# Altium PCB PCB V1.0.PcbDoc (part 1 of 3)
Units mil, origin at the board's own origin, x right, y up, seen from the top; angles counter-clockwise.
Board outline 1771.65 x 1771.65 mil, 6 copper layers (SIG/GND1, GND1, PWR, SIG/GND2, GND2, SIG/GND3), stack 60.866 mil thick; 266 components, 127 nets, 826 pads, 928 vias.
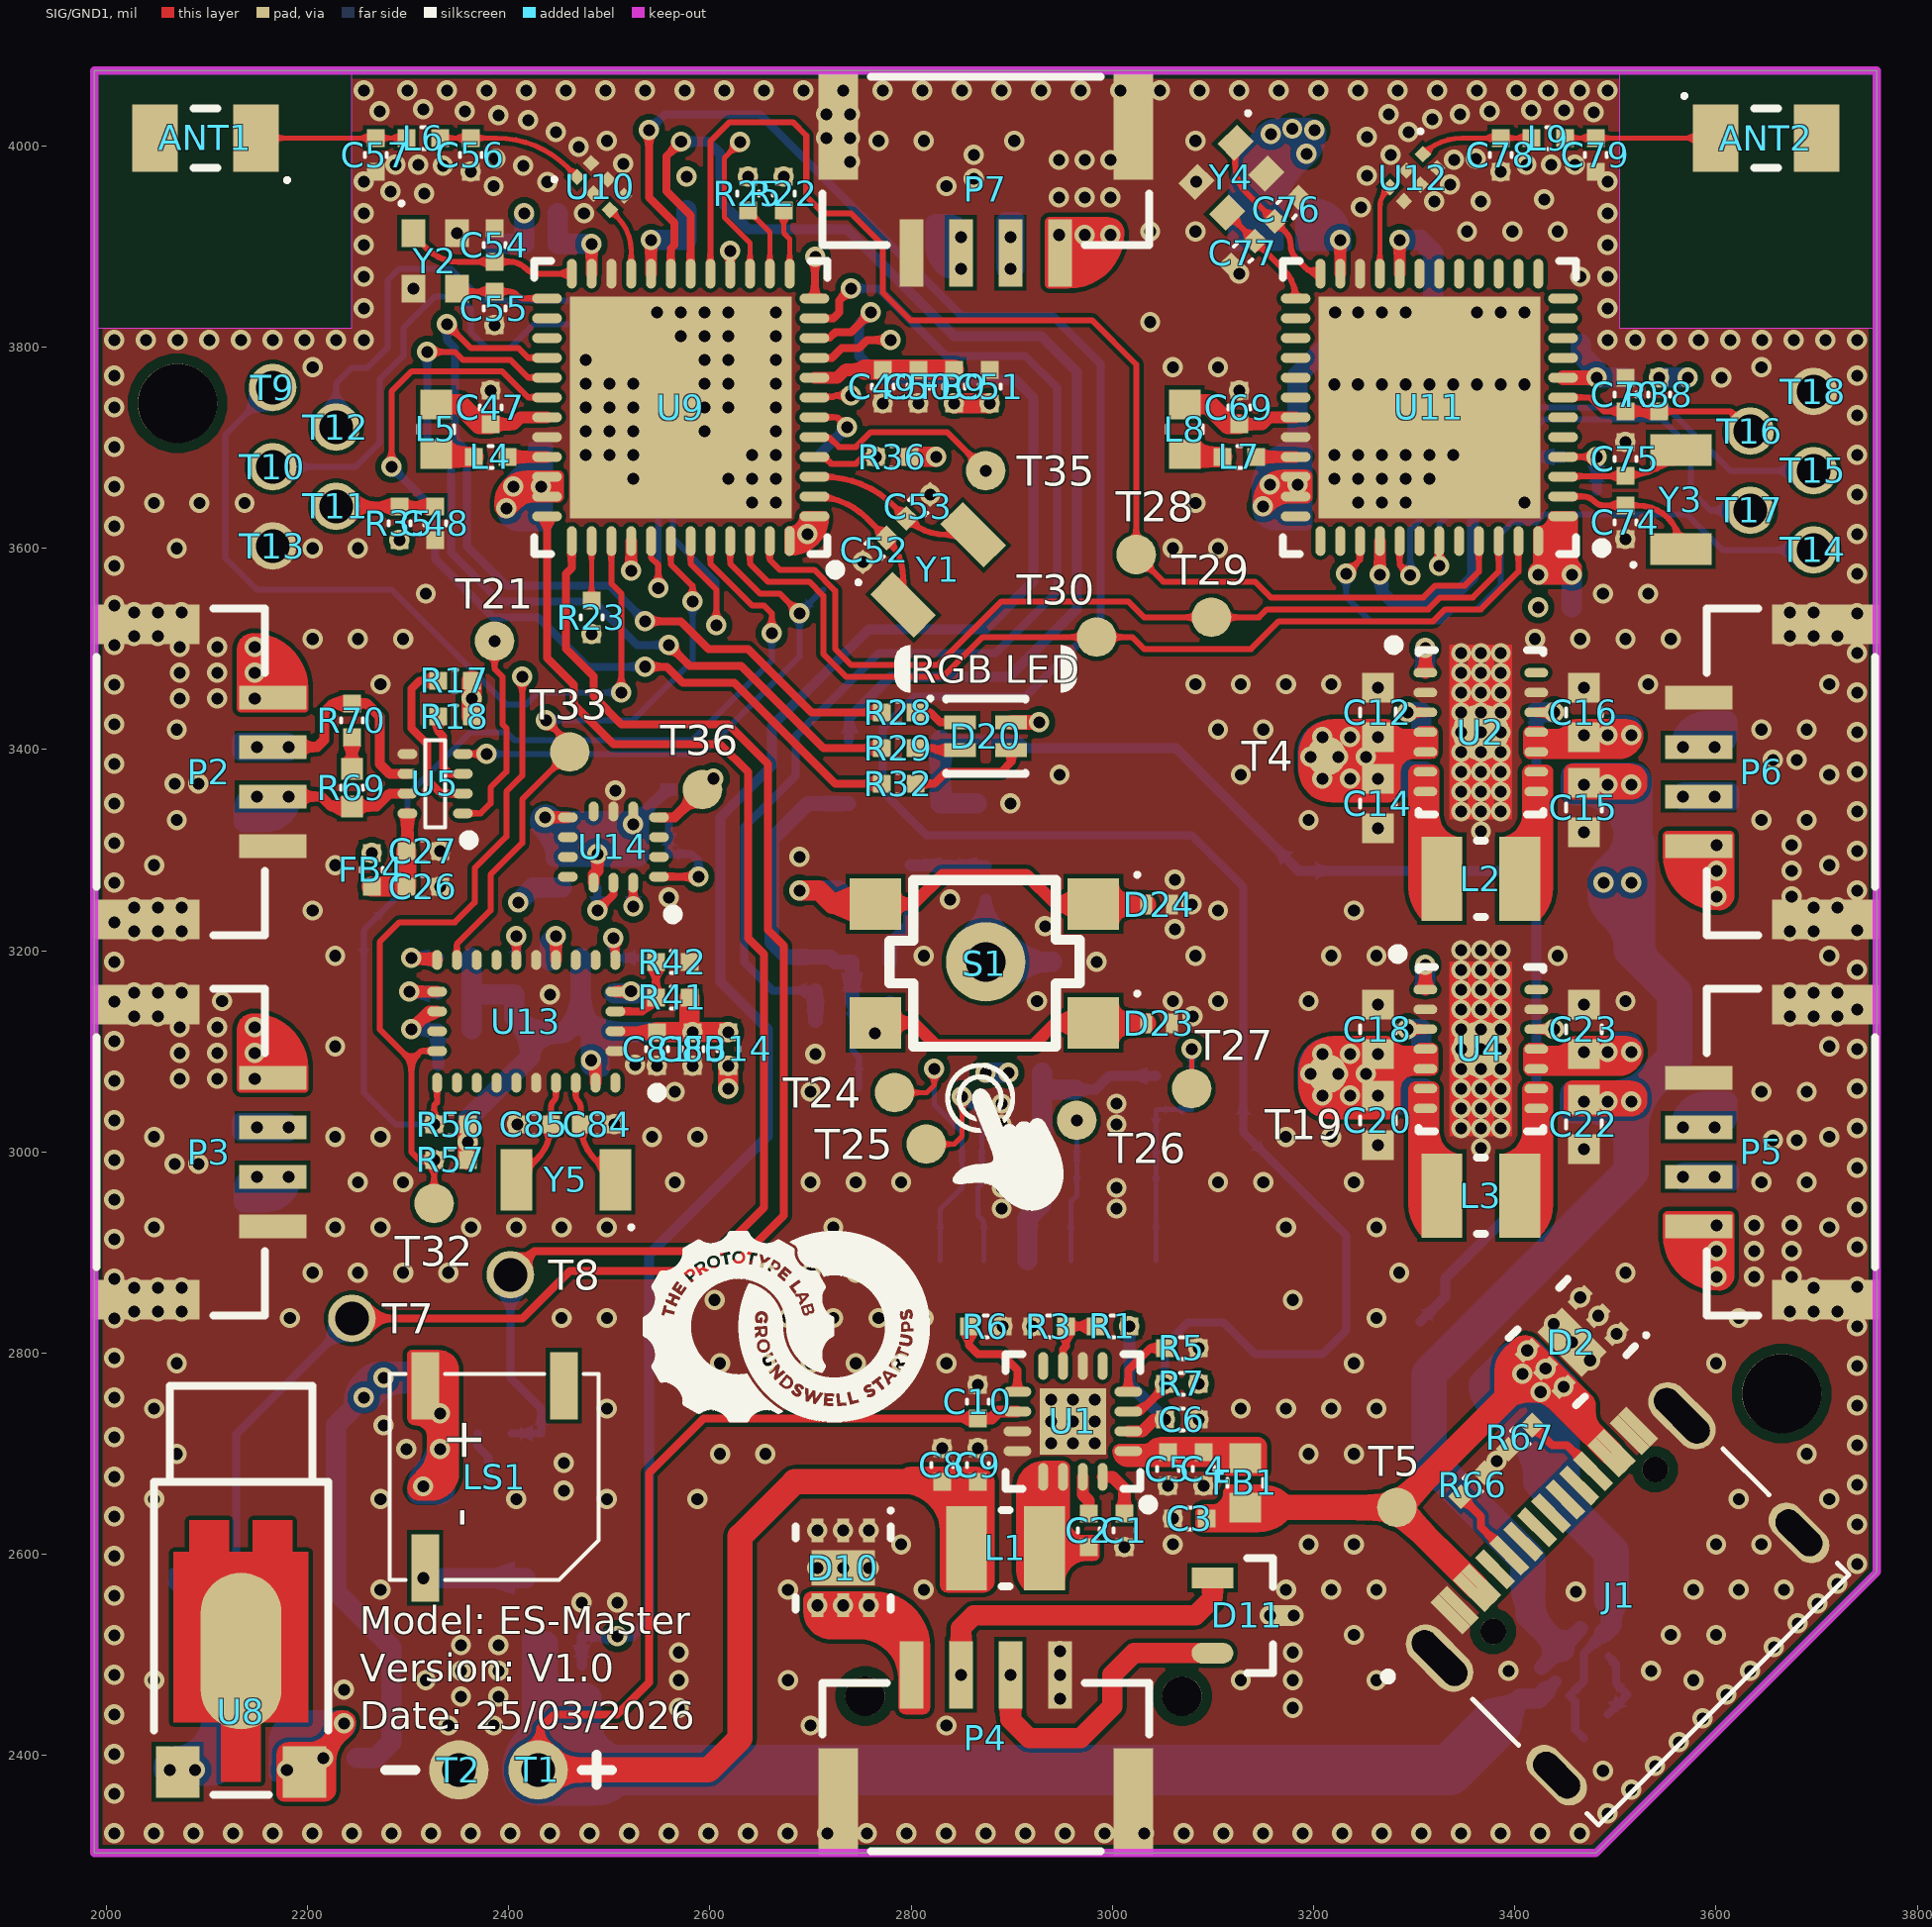
[diagram p0: SIG/GND1 view]
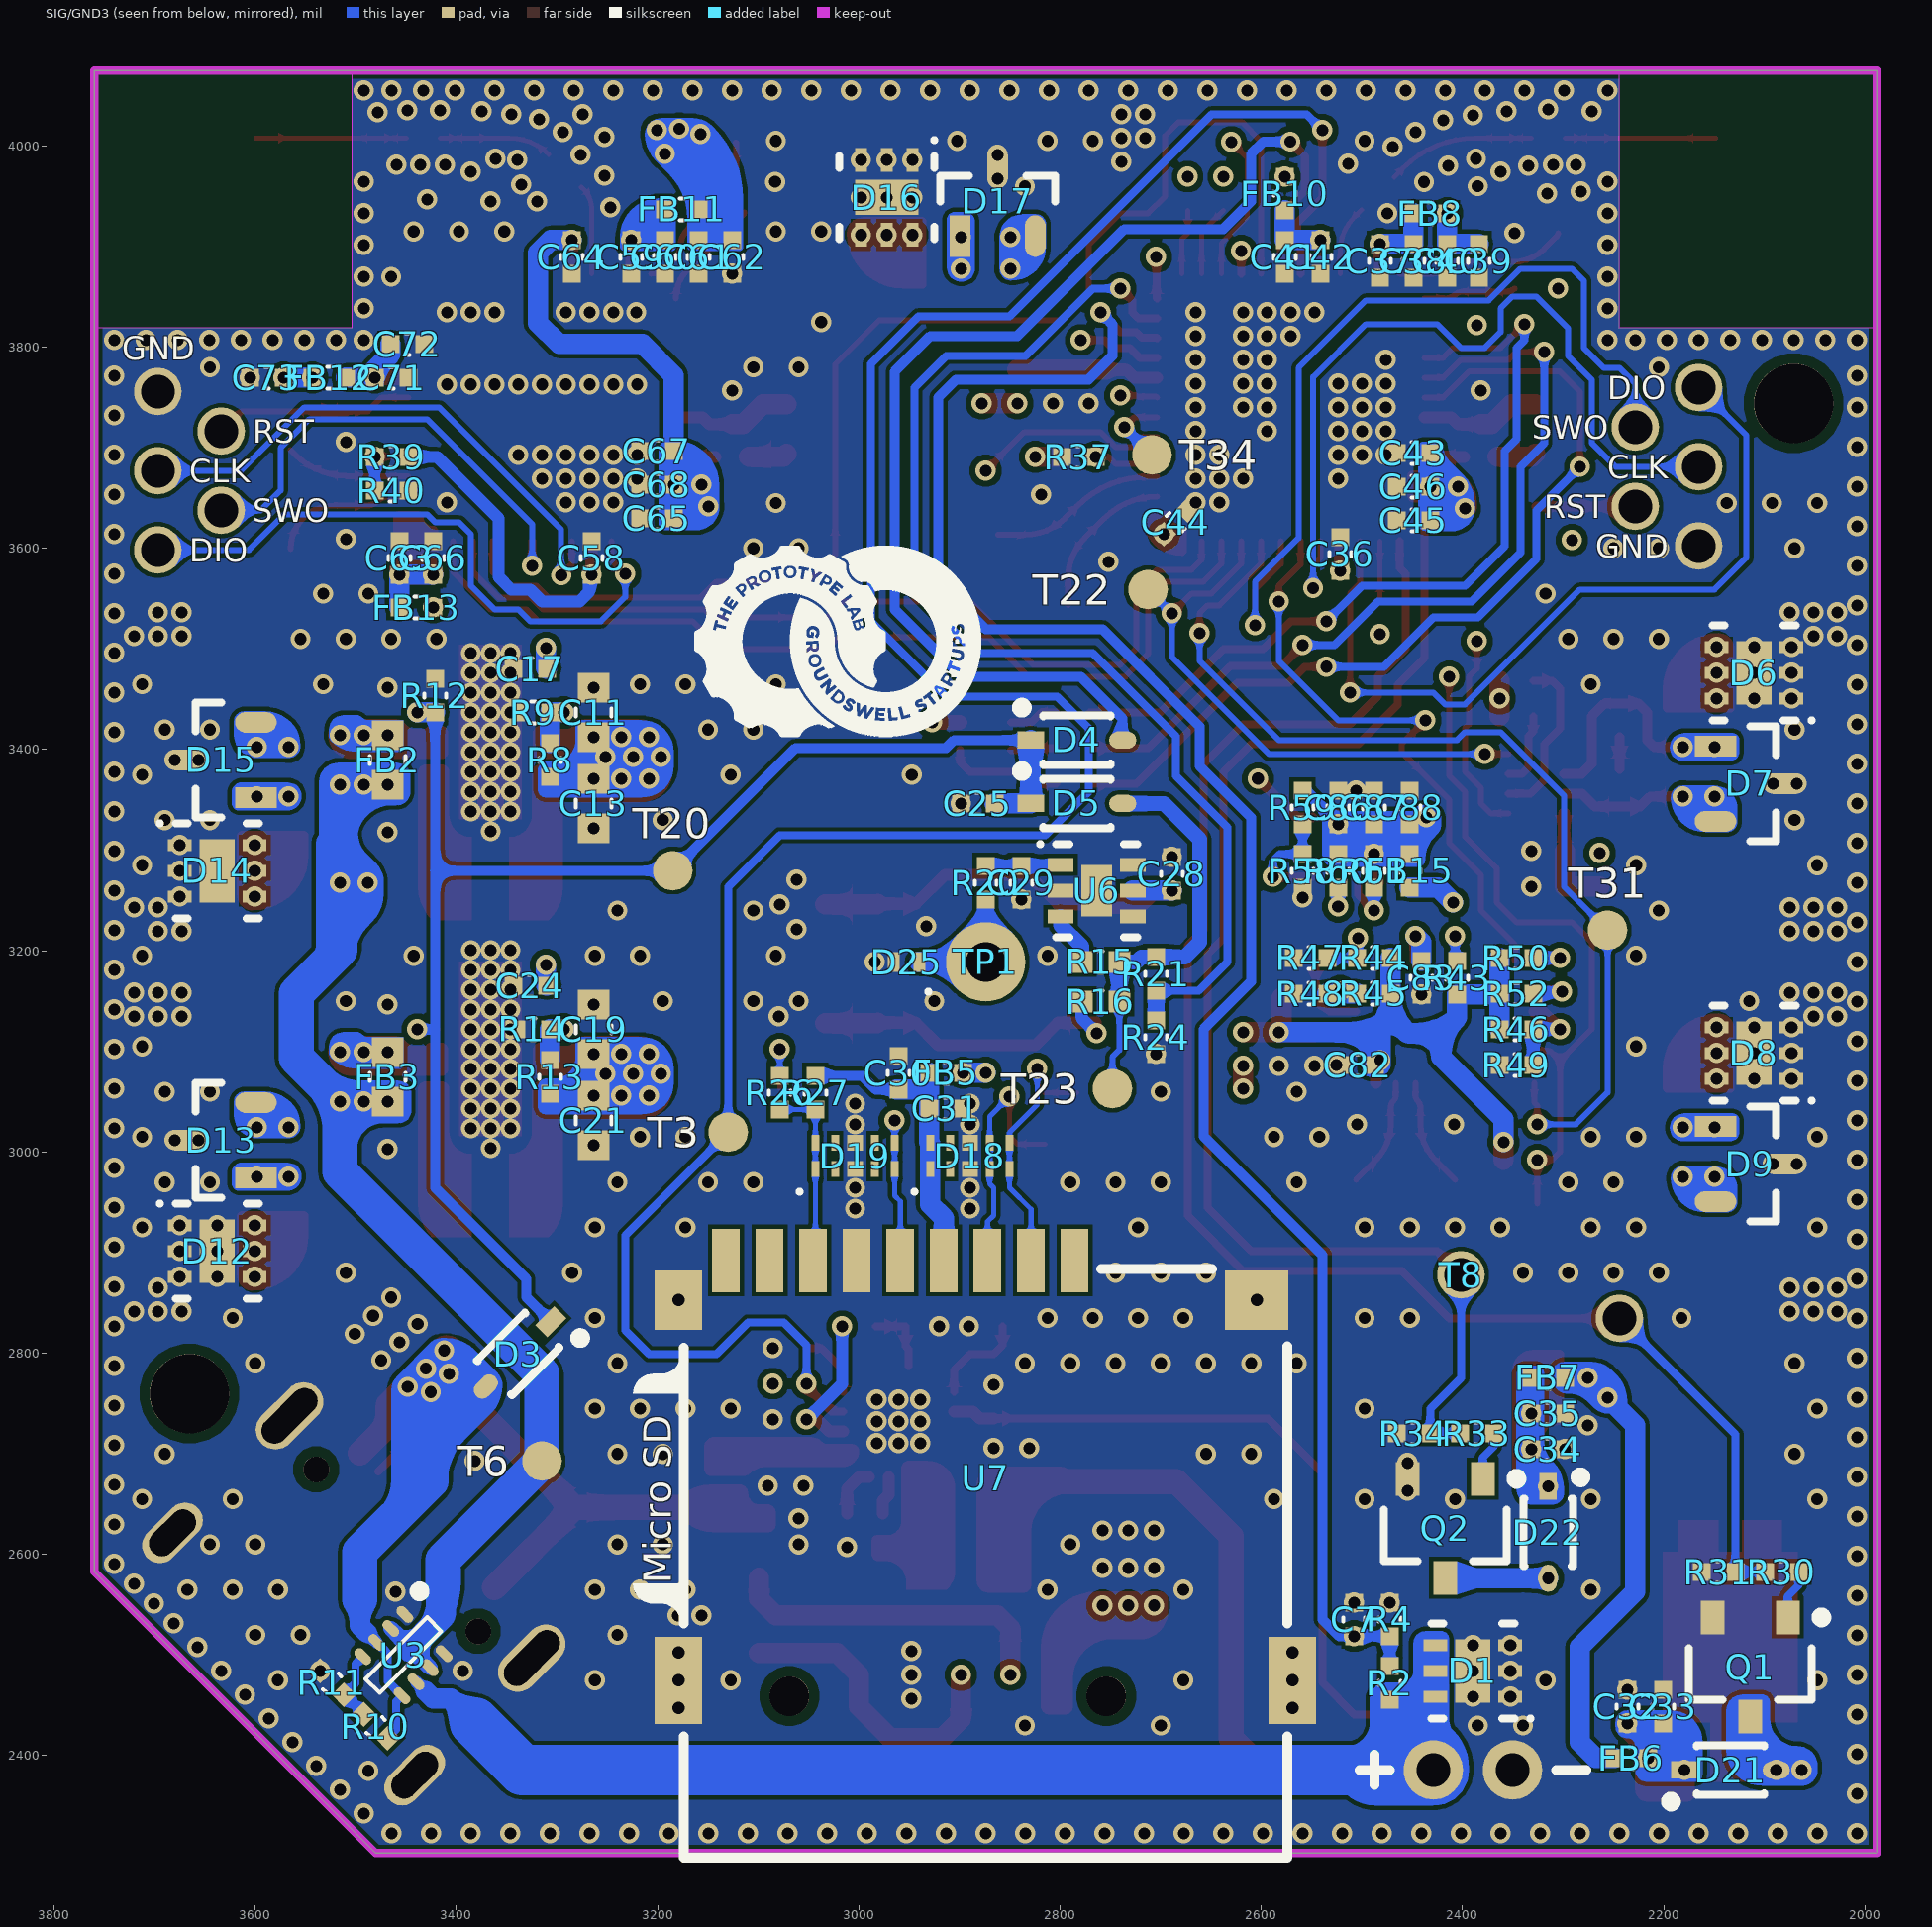
[diagram p1: SIG/GND3 view, seen from below]
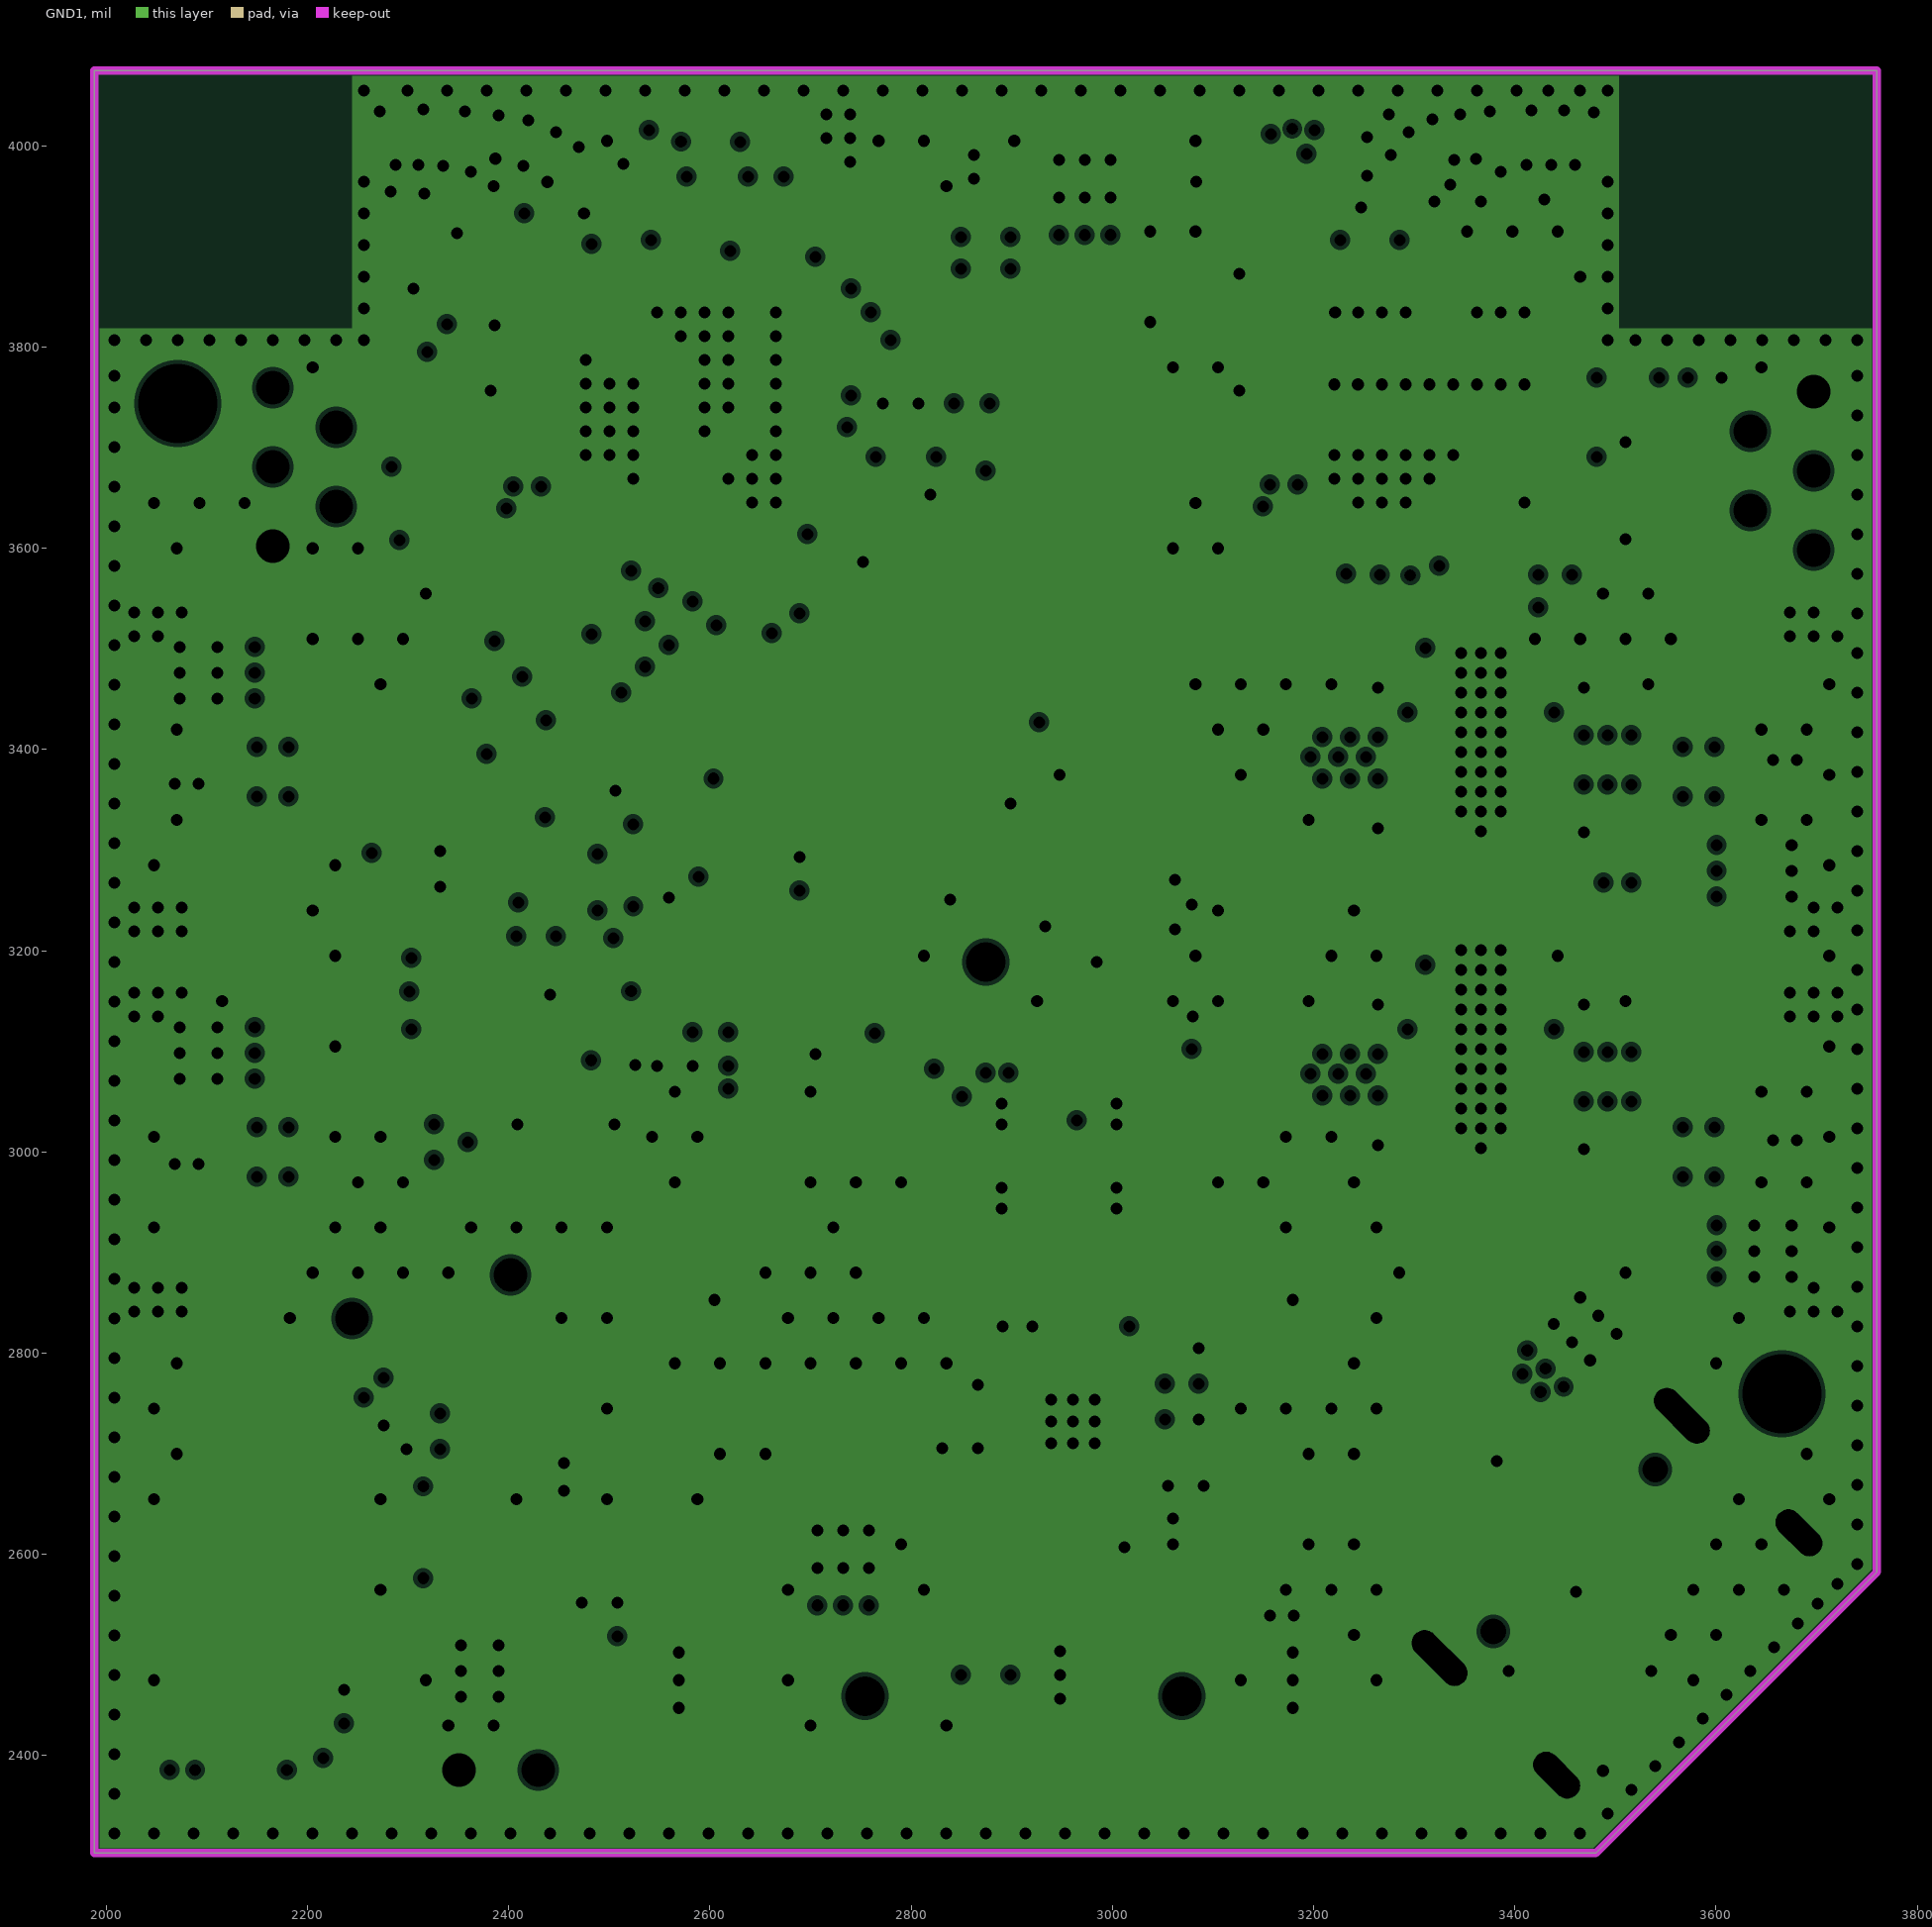
[diagram p2: GND1, clearances drawn from the general rule]
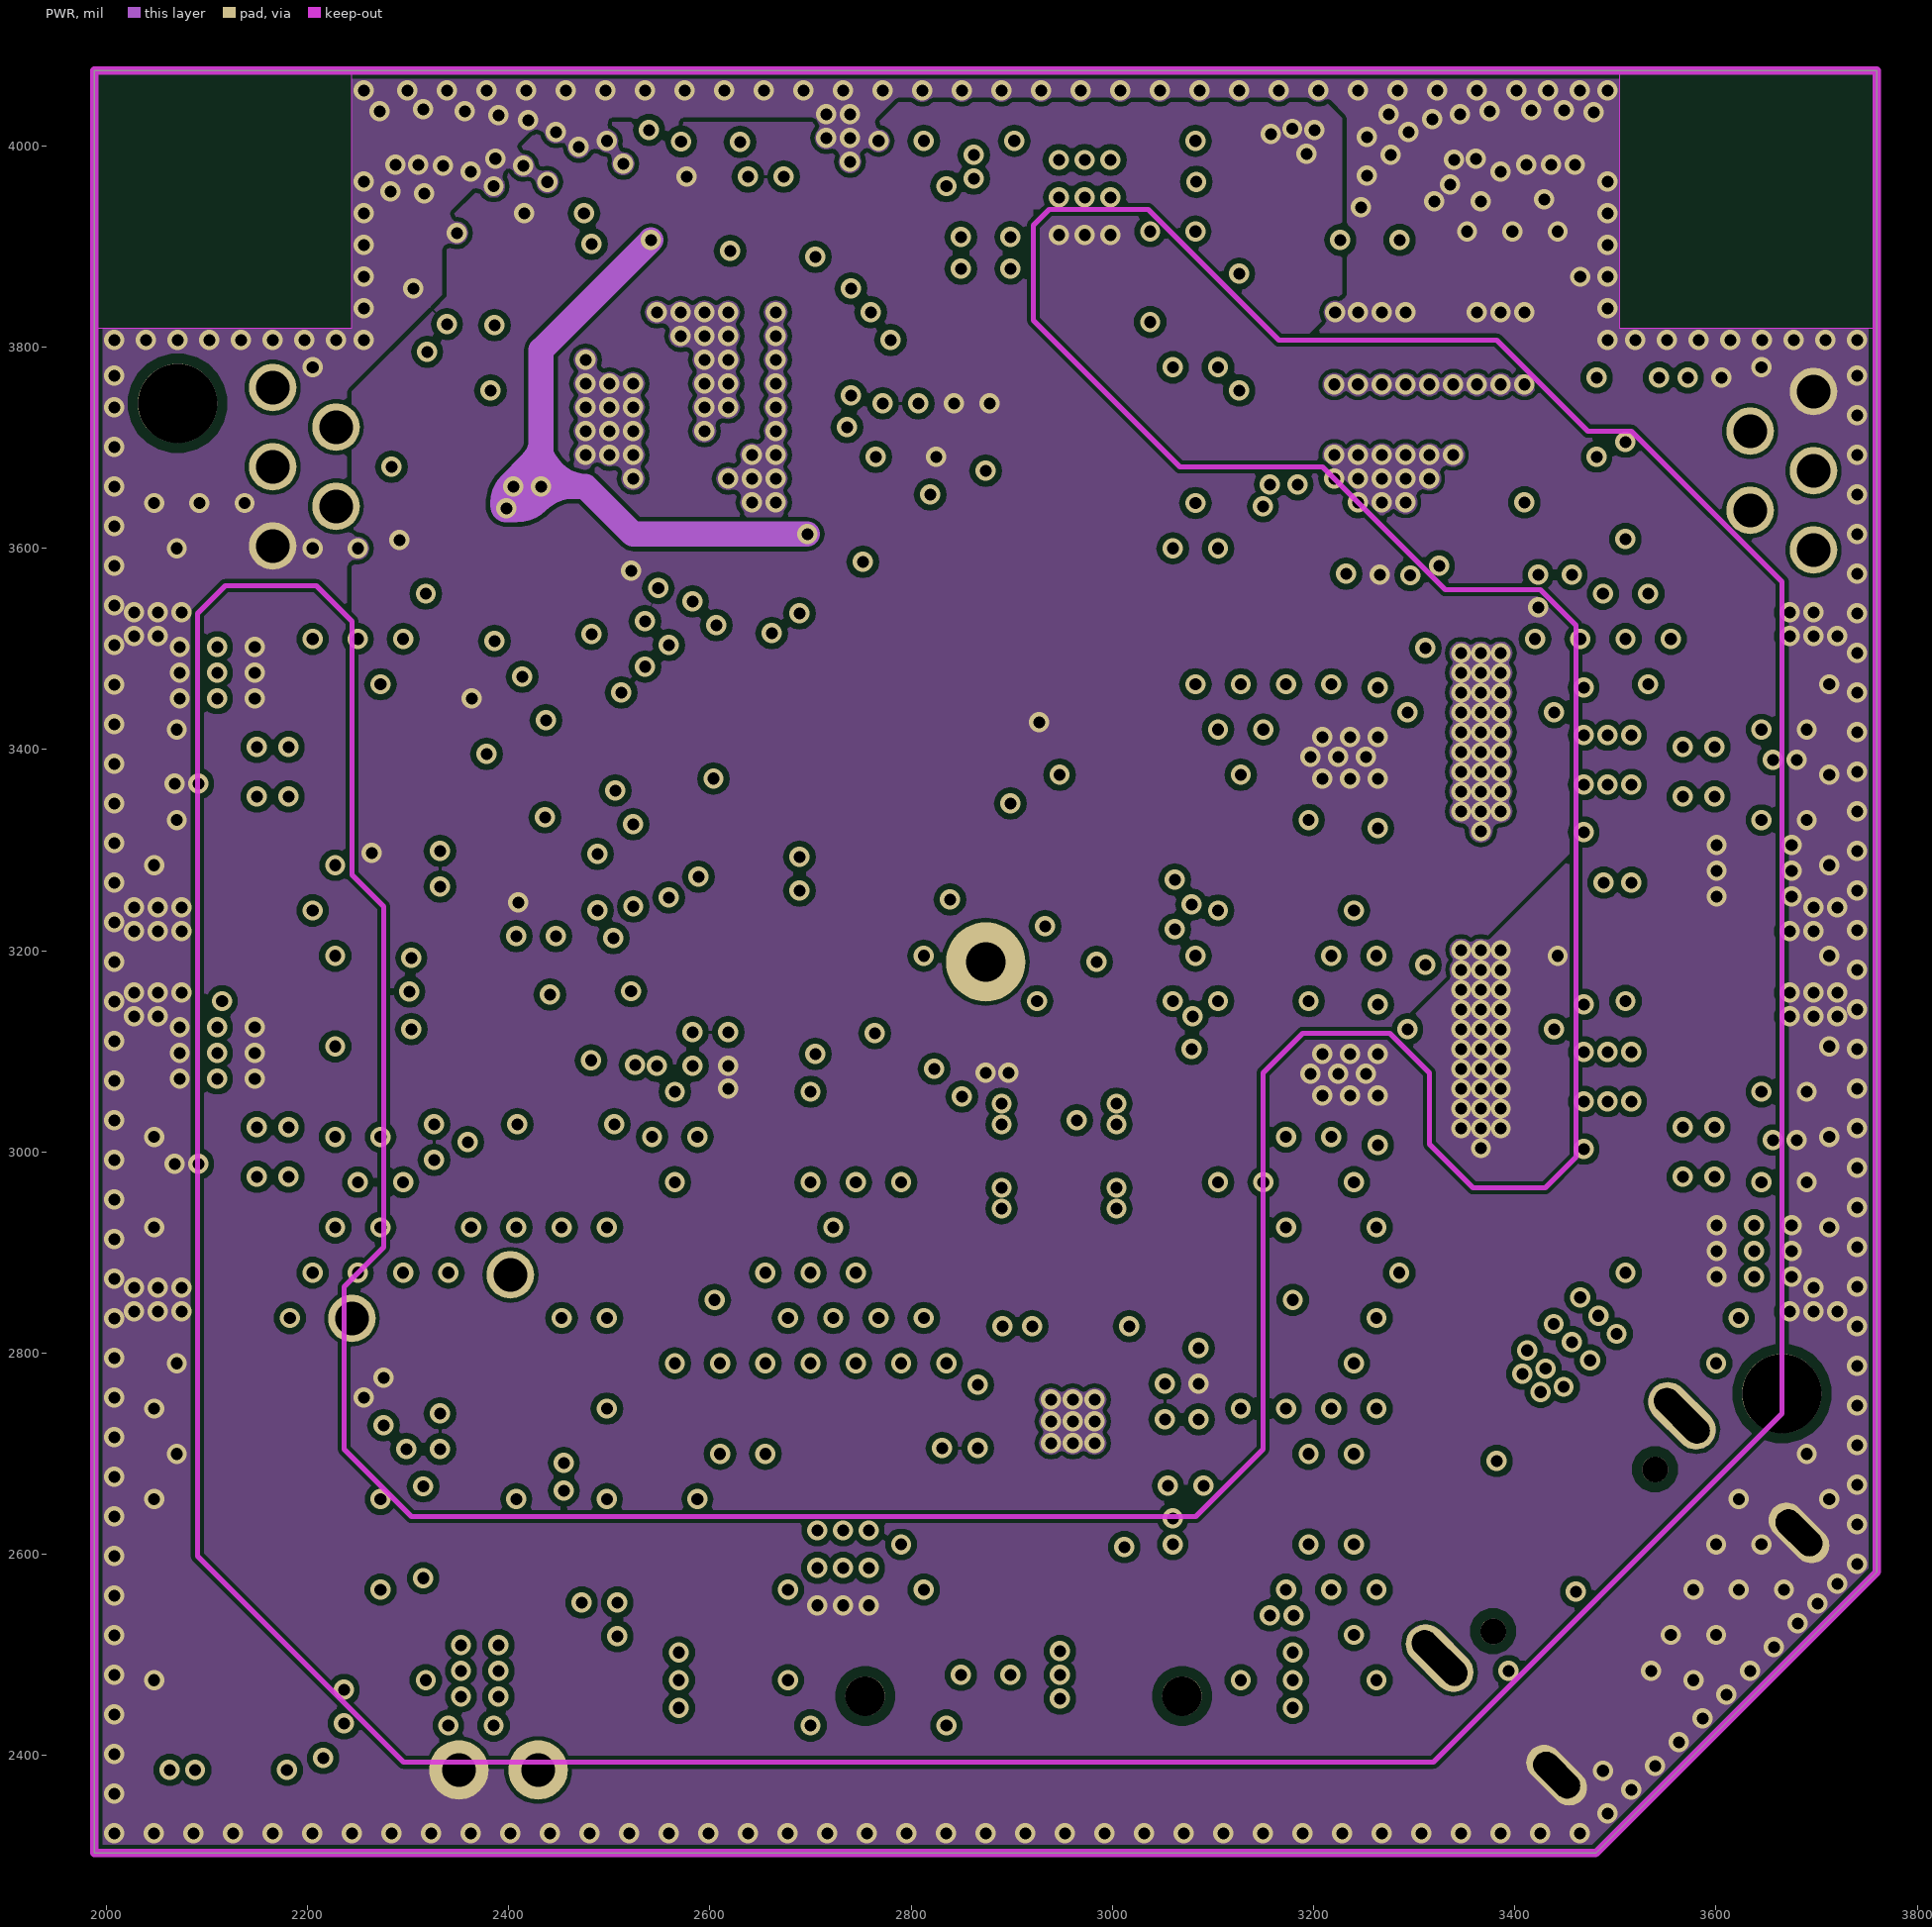
[diagram p3: PWR]
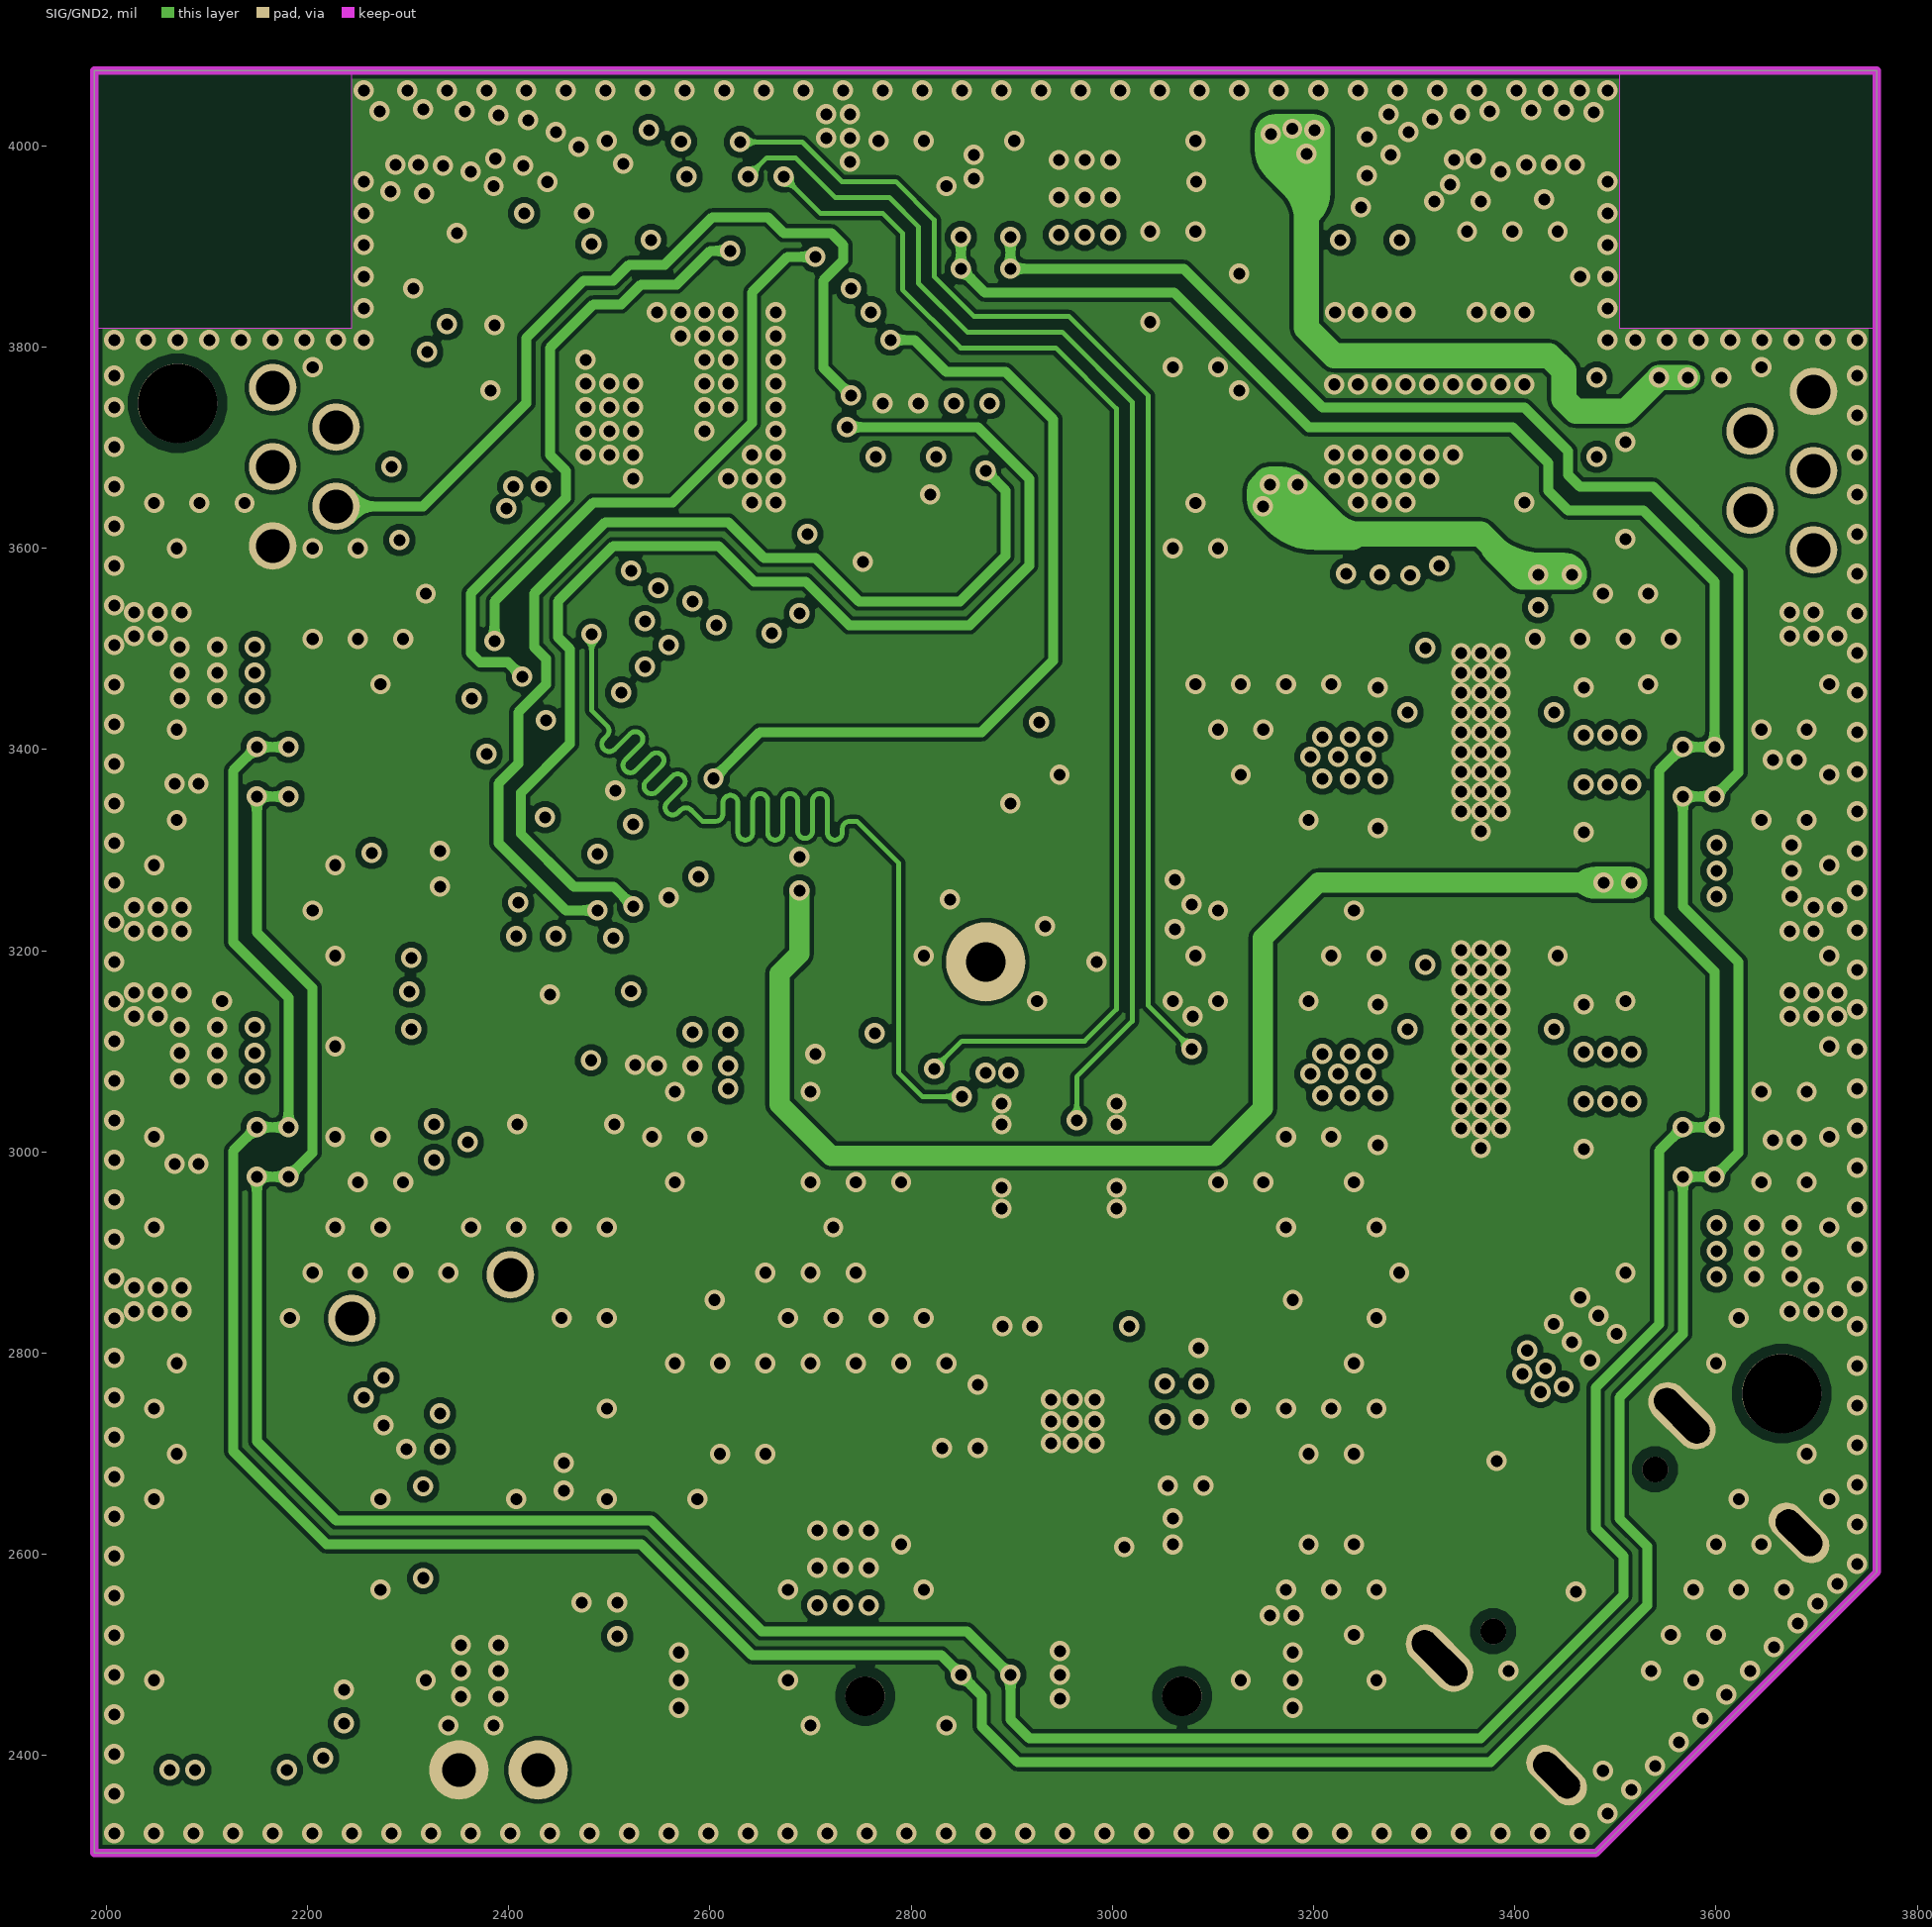
[diagram p4: SIG/GND2]
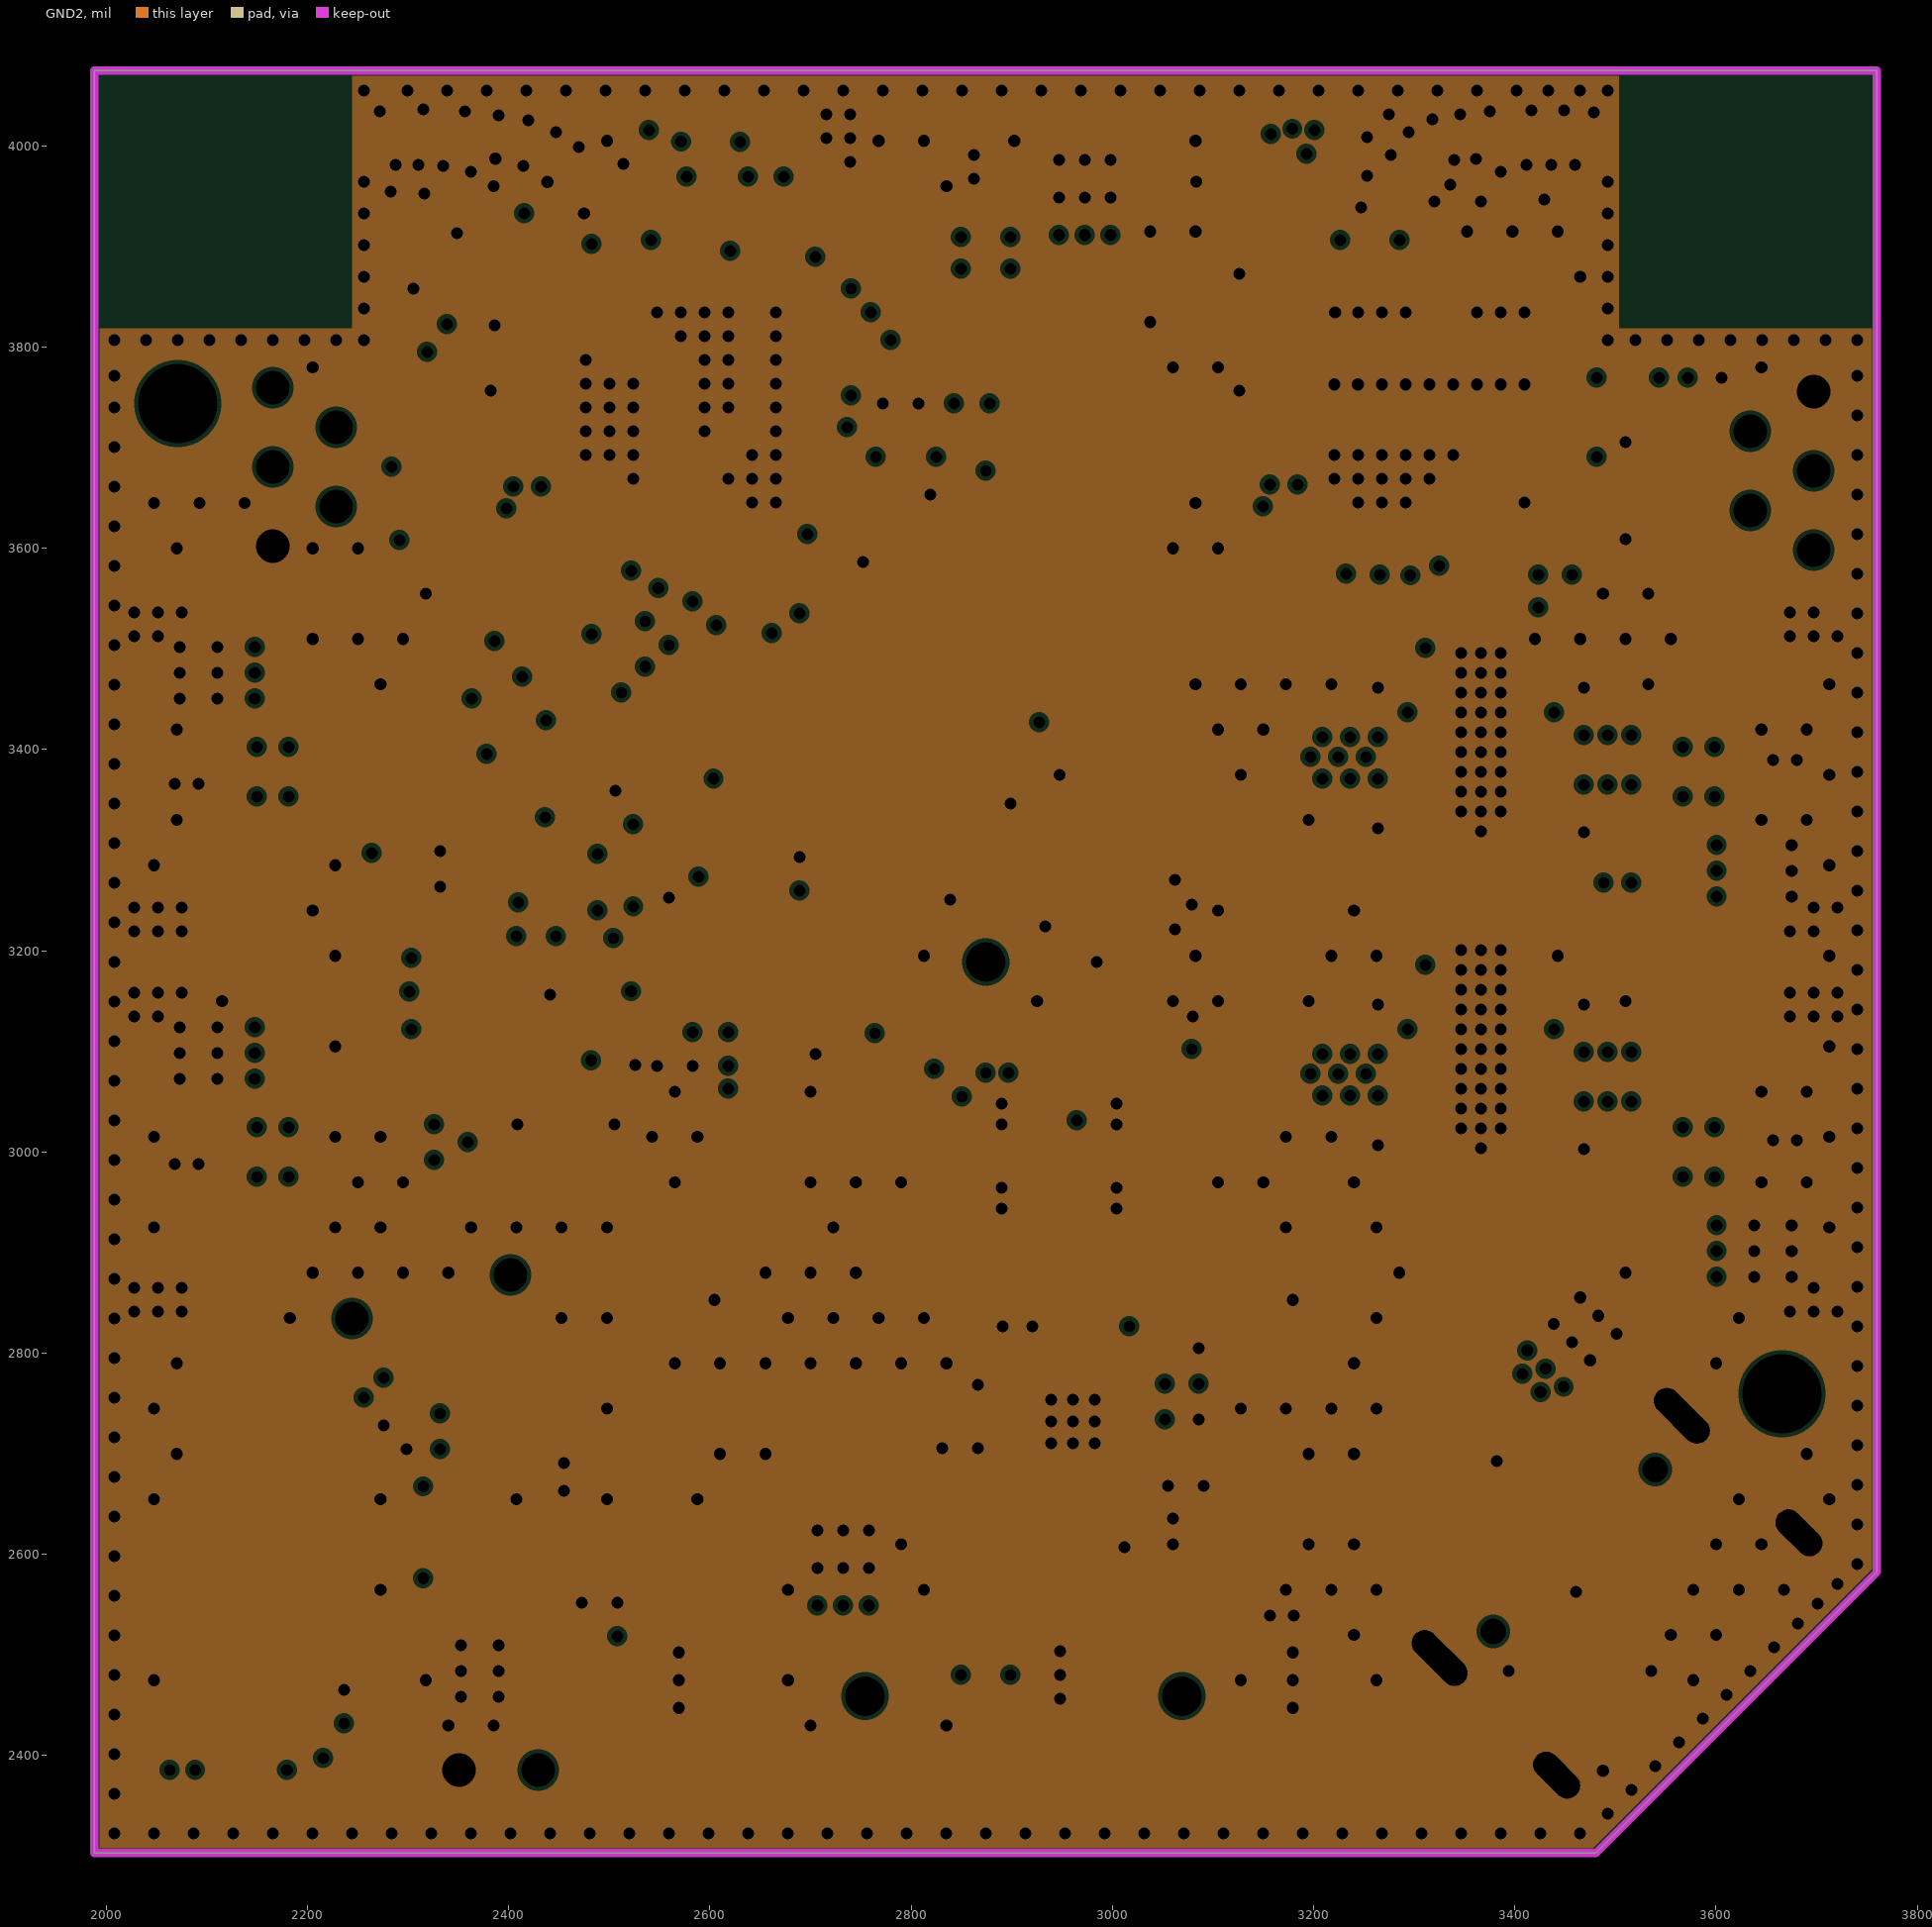
[diagram p5: GND2, clearances drawn from the general rule]
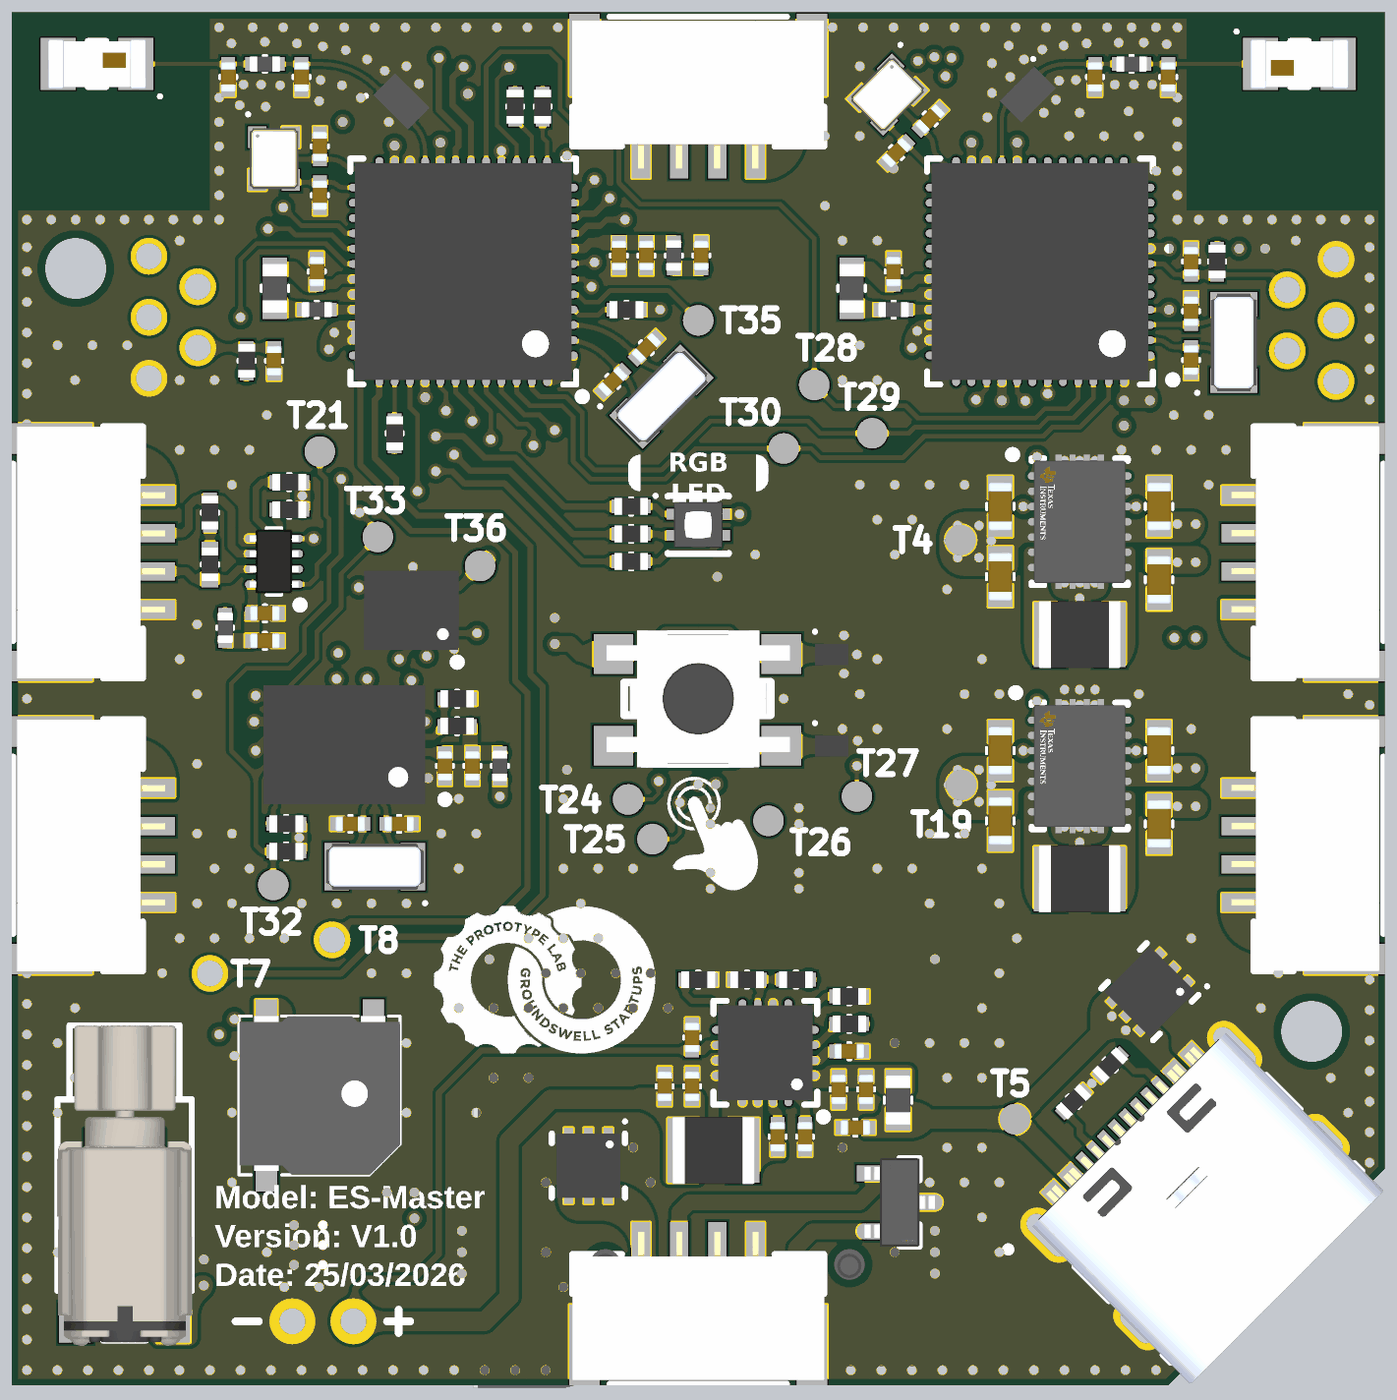
[diagram p8: 3D render of the assembled board from above, using the file's embedded part models]
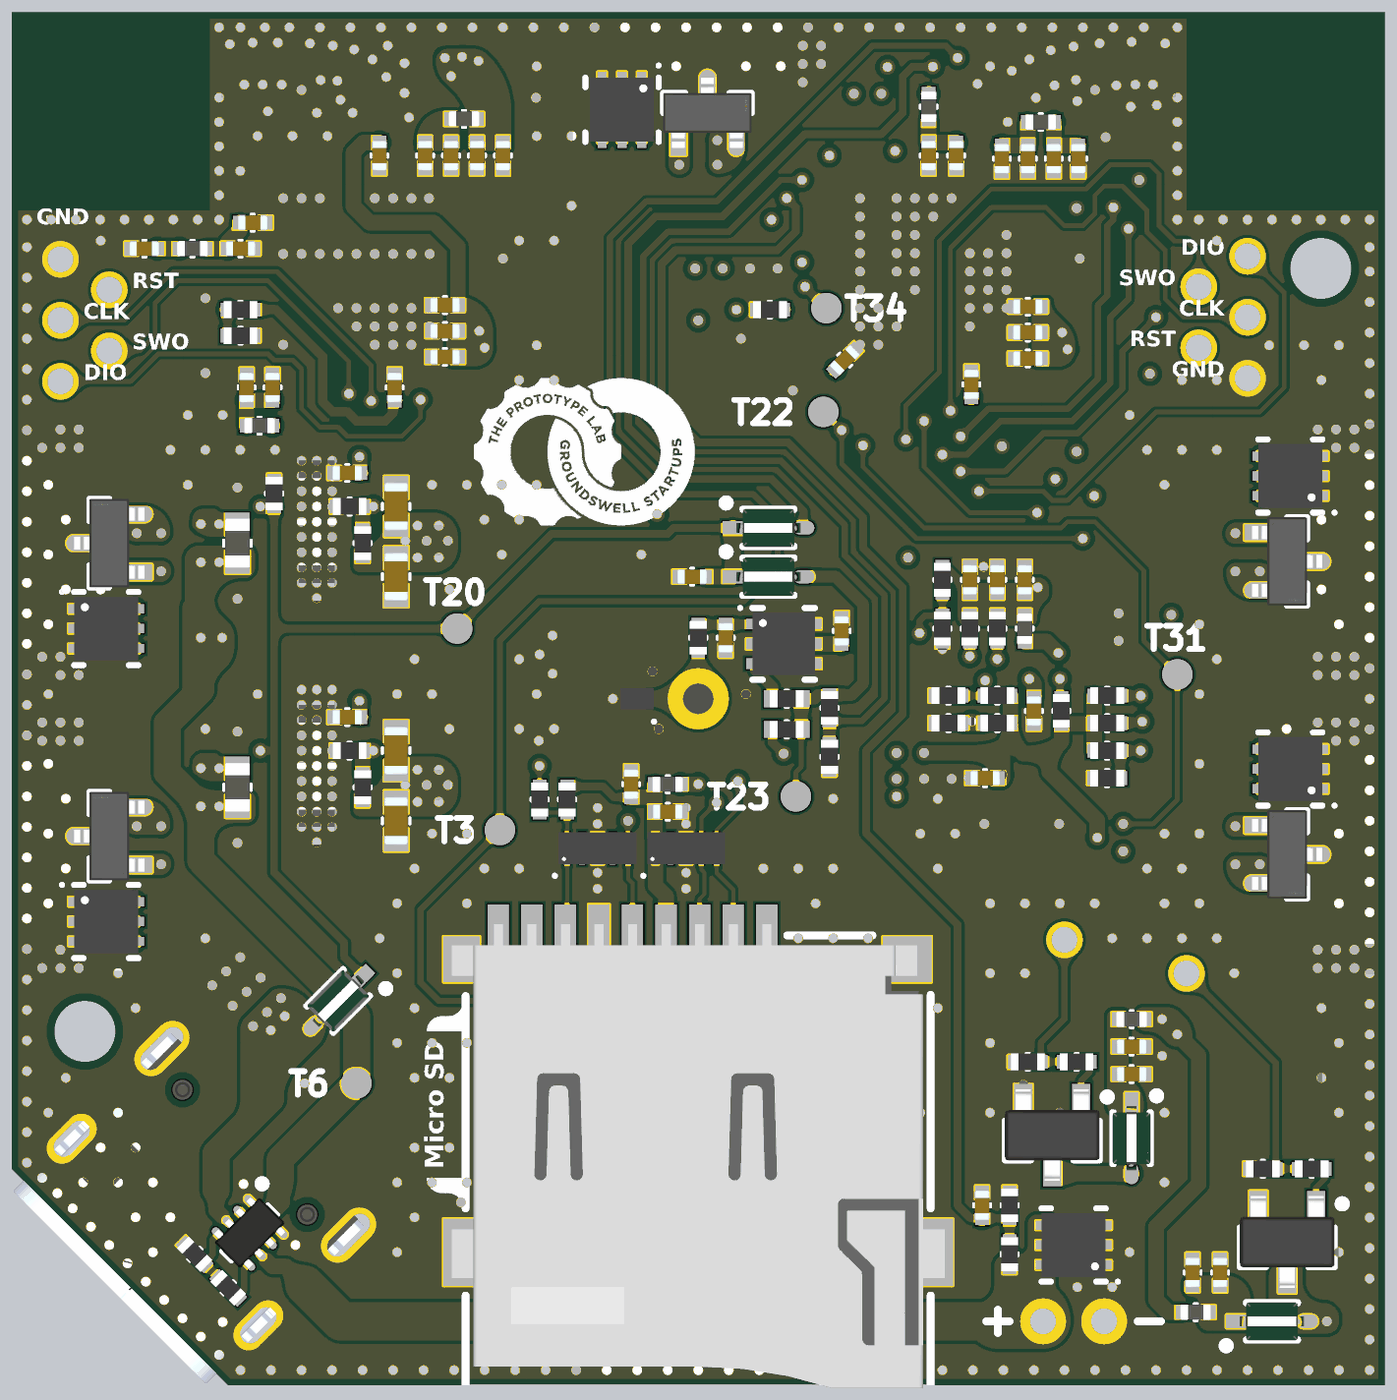
[diagram p9: 3D render of the assembled board from below, using the file's embedded part models]

## Layer stack, top to bottom
Top Solder: solder mask 1.2, Solder Resist, Dk 3.8
SIG/GND1: signal copper 1.378
Prepreg 1: prepreg 3.9134, 3313*1, Dk 4.1
GND1: plane copper 0.5984, net GND
Core 1: core 21.6535, Core, Dk 4.6
PWR: signal copper 0.5984
Prepreg 2: prepreg 4.5827, 2116*1, Dk 4.16
SIG/GND2: signal copper 0.5984
Core 2: core 21.6535, Core, Dk 4.6
GND2: plane copper 0.5984, net GND
Prepreg 3: prepreg 3.9134, 3313*1, Dk 4.1
SIG/GND3: signal copper 1.378
Bottom Solder: solder mask 1.2, Solder Resist, Dk 3.8

## Board outline
1988.19,2303.15 3480.31,2303.15 3759.84,2582.68 3759.84,4074.8 1988.19,4074.8

## Design rules (kind name [scope] priority, off if disabled: settings)
BoardOutlineClearance [All] p1: gap=7.87 ignorepadtopadclearanceinfootprint=FALSE
Clearance 40V [InNetClass('HV_40V') vs Not InNetClass('HV_40V')] p1 off: gap=5.12 ignorepadtopadclearanceinfootprint=TRUE except(4: Fill-Text Poly-Text Region-Text Text-Text; 5.91: Arc-Text Track-Text SMDPad-Text THPad-Text Via-Text; 7.87: Arc-THPad Track-THPad SMDPad-THPad THPad-THPad; 9.84: SMDPad-Hole THPad-Hole Via-Hole Fill-Hole Poly-Hole Region-Hole Text-Hole; 10: Arc-Hole Track-Hole THPad-Via Via-Via)
Clearance 80V [InNetClass('100V')] p2 off: gap=9.06 ignorepadtopadclearanceinfootprint=TRUE
Clearance "General Clearence JLC" [All] p3: gap=4 ignorepadtopadclearanceinfootprint=TRUE except(3.5: Arc-Arc Arc-Track Track-Track; 5: Arc-SMDPad Arc-Via Track-SMDPad Track-Via SMDPad-SMDPad SMDPad-Via; 5.91: SMDPad-Text THPad-Text Via-Text; 7.87: Arc-THPad Track-THPad SMDPad-THPad THPad-THPad; 9.84: SMDPad-Hole THPad-Hole Via-Hole Fill-Hole Poly-Hole Region-Hole Text-Hole; 10: Arc-Hole Track-Hole THPad-Via Via-Via)
ComponentClearance [All] p1: gap=4 collisioncheckmode=3 verticalgap=4 showdistances=TRUE
DiffPairsRouting "DiffPairsRouting 90ohm" [InDifferentialPairClass('90R_diff')] p1: maxlimit=10 minlimit=5 mostfreqgap=10 toplayer_maxgap=5 toplayer_prefgap=5 toplayer_minwidth=4.84 toplayer_maxwidth=4.84 toplayer_prefwidth=4.84 bottomlayer_maxgap=5 bottomlayer_prefgap=5 bottomlayer_minwidth=4.84 bottomlayer_maxwidth=4.84 bottomlayer_prefwidth=4.84 impedanceprofiledriven=TRUE impedanceprofileid={306CB750-895A-4720-9D76-EC01B0257AFF} impedanceprofilevalue=90.000000 maxuncoupledlength=500
DiffPairsRouting "DiffPairsRouting 100ohm" [InDifferentialPairClass('120ohm_diff')] p2: maxlimit=15 minlimit=5 mostfreqgap=15 toplayer_mingap=15 toplayer_minwidth=3.52 toplayer_maxwidth=3.52 toplayer_prefwidth=3.52 bottomlayer_mingap=15 bottomlayer_minwidth=3.52 bottomlayer_maxwidth=3.52 bottomlayer_prefwidth=3.52 impedanceprofiledriven=TRUE impedanceprofileid={3A86BE7C-3B7D-46C8-BF05-D5B4A5EA3E43} impedanceprofilevalue=120.000000 maxuncoupledlength=500
Height [All] p1: minheight=0 maxheight=71497.94 prefheight=500
HoleSize [All] p1: absolutevalues=TRUE maxlimit=248.03 minlimit=11.81 maxpercent=80.000 minpercent=20.000
HoleToHoleClearance [All] p1: gap=7.87 allowstackedmicrovias=FALSE
MatchedLengths [InNetClass('50ps_SDIO')] p1: tolerance=1000 checknetsindiffpair=FALSE checkdiffpairvsdiffpair=TRUE checkxsignals=TRUE checkothers=TRUE usedelayunits=TRUE delaytolerance=50.000000
MinimumAnnularRing [All] p1: minimumring=2.5
MinimumSolderMaskSliver [All] p1: minsoldermaskwidth=3.15
PlaneClearance "High Voltage Plane Clearance" [InNetClass('HV_80V')] p1: clearance=25.2
PlaneClearance "General PlaneClearance" [All] p2: clearance=4
PlaneConnect [All] p1: planeconnectstyle=Direct reliefexpansion=11.81 reliefentries=4 reliefconductorwidth=15 reliefairgap=4
PolygonConnect [All] p1: connectstyle=Direct reliefconductorwidth=15 reliefentries=4 polygonreliefangle="90 Angle" airgapwidth=5
RoutingVias [All] p1: holewidth=12 width=20 viastyle="Through Hole" minholewidth=11.81 minwidth=19.68 maxholewidth=100 maxwidth=100
SilkToSilkClearance [All] p1: silktosilkclearance=0
SilkToSolderMaskClearance [IsPad] p1: minsilkscreentomaskgap=4 clearancetoexposedcopper=TRUE
SolderMaskExpansion [All] p1: expansion=2 istentingtop=FALSE
SupplyNets "Schematic Supply Nets_6" [InNet('3V3_ERM')] p1: voltage=0.000
SupplyNets "Schematic Supply Nets_2" [InNet('3V3_MCU2')] p2: voltage=0.000
SupplyNets "Schematic Supply Nets" [InNet('3V3_MCU1')] p3: voltage=0.000
SupplyNets "Schematic Supply Nets_17" [InNet('5V_in')] p4: voltage=0.000
SupplyNets "Schematic Supply Nets_14" [InNet('3V3_BNO')] p5: voltage=0.000
SupplyNets "Schematic Supply Nets_13" [InNet('3V3_ICM')] p6: voltage=0.000
SupplyNets "Schematic Supply Nets_11" [InNet('3V3_BZ')] p7: voltage=0.000
SupplyNets "Schematic Supply Nets_9" [InNet('3V3_RS485')] p8: voltage=0.000
SupplyNets "Schematic Supply Nets_8" [InNet('VBAT')] p9: voltage=0.000
SupplyNets "Schematic Supply Nets_7" [InNet('VBAT/5V')] p10: voltage=0.000
SupplyNets "Schematic Supply Nets_3" [InNet('3V3_SD')] p11: voltage=0.000
SupplyNets "Schematic Supply Nets_1" [InNet('REGN')] p12: voltage=0.000
SupplyNets "Schematic Supply Nets_16" [InNet('GND')] p13: voltage=0.000
SupplyNets "Schematic Supply Nets_5" [InNet('5V_main')] p14: voltage=0.000
SupplyNets "Schematic Supply Nets_4" [InNet('3V3_main')] p15: voltage=0.000
UnRoutedNet [All] p1: checkbadconnections=TRUE
Width [InNetClass('50ohm')] p1: maxlimit=5.12 minlimit=4.83 preferedwidth=5.12 toplayer_minwidth=5.12 midlayer1_maxwidth=4.83 midlayer1_prefwidth=4.83 midlayer2_maxwidth=4.83 midlayer2_prefwidth=4.83 bottomlayer_minwidth=5.12 impedanceprofiledriven=TRUE impedanceprofileid={0088AE64-557E-4D86-AE8B-A0C06BEEBC35} impedanceprofilevalue=50.000000 minimp=50.000000 maximp=50.000000 favimp=50.000000
Width General [All] p2: maxlimit=100 minlimit=3.5 preferedwidth=5
19 further rules are at their usual default settings.

## Classes and differential pairs
net class 50ps_SDIO: SD_MISO SD_MOSI_1 SD_NSS_1 SD_SCK_1
net class 50ohm: MCU1_ANT MCU2_ANT NetANT1_1 NetANT2_1 NetC56_1 NetC78_1 SD_MISO SD_MISO_1 SD_MOSI SD_MOSI_1 SD_NSS SD_NSS_1 SD_SCK SD_SCK_1
component class "U_STM32WB55 Sensor MCU": ANT2 C58 C59 C60 C61 C62 C63 C64 C65 C66 C67 C68 C69 C70 C71 C72 C73 C74 C75 C76 C77 C78 C79 FB11 FB12 FB13 L7 L8 L9 R38 R39 R40 T14 T15 T16 T17 T18 T28 T29 T30 U11 U12 Y3 Y4
component class "U_STM32WB55 Main MCU": ANT1 C36 C37 C38 C39 C40 C41 C42 C43 C44 C45 C46 C47 C48 C49 C50 C51 C52 C53 C54 C55 C56 C57 FB8 FB9 FB10 L4 L5 L6 R35 R36 R37 T9 T10 T11 T12 T13 U9 U10 Y1 Y2
component class "U_RS485 Com and Connectors": C26 C27 D6 D7 D8 D9 D10 D11 D12 D13 D14 D15 D16 D17 FB4 P2 P3 P4 P5 P6 P7 R17 R18 R69 R70 T21 T22 U5
component class "U_Power Supply Section": C1 C2 C3 C4 C5 C6 C7 C8 C9 C10 C11 C12 C13 C14 C15 C16 C17 C18 C19 C20 C21 C22 C23 C24 C25 D1 D2 D3 D4 D5 FB1 FB2 FB3 J1 L1 L2 L3 R1 R2 R3 R4 R5 R6 R7 R8 R9 R10 R11 R12 R13 R14 R66 R67 T1 T2 T3 T4 T5 T6 T19 T20 U1 U2 U3 U4
component class U_Peripheral: C28 C29 C30 C31 C32 C33 C34 C35 D18 D19 D20 D21 D22 D23 D24 D25 FB5 FB6 FB7 LS1 Q1 Q2 R15 R16 R20 R21 R22 R23 R24 R25 R26 R27 R28 R29 R30 R31 R32 R33 R34 S1 T7 T8 T23 T24 T25 T26 T27 TP1 U6 U7 U8
component class "U_IMU Section": C80 C81 C82 C83 C84 C85 C86 C87 C88 FB14 FB15 R41 R42 R43 R44 R45 R46 R47 R48 R49 R50 R52 R56 R57 R58 R59 R60 R61 T31 T32 T33 T34 T35 T36 U13 U14 Y5

## Components (designator, comment, footprint, x,y, rotation, side; value= is the part's Value field where it differs from the comment)
ANT1 "2450AT18B100E" "2450AT18B100E IPC-C" 2098.43,4007.87 r180 top
ANT2 "2450AT18B100E" "2450AT18B100E IPC-C" 3649.61,4007.87 r0 top
C1 "10uF 10V 0402 X5R" "0402 IPC CLASS C CAPACITOR" 3011.81,2624.02 r270 top
C2 "47nF 50V 0402 X7R" "0402 IPC CLASS C CAPACITOR" 2976.38,2624.02 r270 top
C3 "100nF 50V 0402 X7R" "0402 IPC CLASS C CAPACITOR" 3076.77,2635.83 r180 top
C4 "2.2uF 10V 0402 X5R" "0402 IPC CLASS C CAPACITOR" 3090.55,2685.04 r270 top
C5 "100nF 50V 0402 X7R" "0402 IPC CLASS C CAPACITOR" 3055.12,2685.04 r270 top
C6 "2.2uF 10V 0402 X5R" "0402 IPC CLASS C CAPACITOR" 3068.9,2734.25 r0 top
C7 "100nF 50V 0402 X7R" "0402 IPC CLASS C CAPACITOR" 2507.87,2535.43 r90 bottom
C8 "100nF 50V 0402 X7R" "0402 IPC CLASS C CAPACITOR" 2830.71,2688.98 r90 top
C9 "10uF 10V 0402 X5R" "0402 IPC CLASS C CAPACITOR" 2866.14,2688.98 r90 top
C10 "10uF 10V 0402 X5R" "0402 IPC CLASS C CAPACITOR" 2866.14,2751.97 r270 top
C11 "22uF 10V 0603 X5R" "0603 IPC CLASS C CAPACITOR" 3263.78,3437.01 r90 bottom
C12 "22uF 10V 0603 X5R" "0603 IPC CLASS C CAPACITOR" 3263.78,3437.01 r90 top
C13 "22uF 10V 0603 X5R" "0603 IPC CLASS C CAPACITOR" 3263.78,3346.46 r270 bottom
C14 "22uF 10V 0603 X5R" "0603 IPC CLASS C CAPACITOR" 3263.78,3346.46 r270 top
C15 "22uF 10V 0603 X5R" "0603 IPC CLASS C CAPACITOR" 3468.5,3342.52 r270 top
C16 "22uF 10V 0603 X5R" "0603 IPC CLASS C CAPACITOR" 3468.5,3437.01 r90 top
C17 "100nF 50V 0402 X7R" "0402 IPC CLASS C CAPACITOR" 3326.77,3480.32 r0 bottom
C18 "22uF 10V 0603 X5R" "0603 IPC CLASS C CAPACITOR" 3263.78,3122.05 r90 top
C19 "22uF 10V 0603 X5R" "0603 IPC CLASS C CAPACITOR" 3263.78,3122.05 r90 bottom
C20 "22uF 10V 0603 X5R" "0603 IPC CLASS C CAPACITOR" 3263.78,3031.5 r270 top
C21 "22uF 10V 0603 X5R" "0603 IPC CLASS C CAPACITOR" 3263.78,3031.5 r270 bottom
C22 "22uF 10V 0603 X5R" "0603 IPC CLASS C CAPACITOR" 3468.5,3027.56 r270 top
C23 "22uF 10V 0603 X5R" "0603 IPC CLASS C CAPACITOR" 3468.5,3122.05 r90 top
C24 "100nF 50V 0402 X7R" "0402 IPC CLASS C CAPACITOR" 3326.77,3165.35 r0 bottom
C25 "10uF 10V 0402 X5R" "0402 IPC CLASS C CAPACITOR" 2881.89,3346.46 r180 bottom
C26 "10uF 10V 0402 X5R" "0402 IPC CLASS C CAPACITOR" 2314.96,3263.78 r0 top
C27 "100nF 50V 0402 X7R" "0402 IPC CLASS C CAPACITOR" 2314.96,3299.21 r0 top
C28 "100nF 50V 0402 X7R" "0402 IPC CLASS C CAPACITOR" 2688.98,3276.57 r90 bottom
C29 "DNP 0402" "0402 IPC Class C Capacitor" 2838.58,3267.72 r270 bottom
C30 "10uF 10V 0402 X5R" "0402 IPC CLASS C CAPACITOR" 2960.63,3078.74 r90 bottom
C31 "100nF 50V 0402 X7R" "0402 IPC CLASS C CAPACITOR" 2913.39,3043.31 r180 bottom
C32 "10uF 10V 0402 X5R" "0402 IPC CLASS C CAPACITOR" 2236.22,2448.82 r90 bottom
C33 "100nF 50V 0402 X7R" "0402 IPC CLASS C CAPACITOR" 2200.79,2448.82 r90 bottom
C34 "10uF 10V 0402 X5R" "0402 IPC CLASS C CAPACITOR" 2314.96,2704.72 r180 bottom
C35 "100nF 50V 0402 X7R" "0402 IPC CLASS C CAPACITOR" 2314.96,2740.16 r180 bottom
C36 "100nF 50V 0402 X7R" "0402 IPC CLASS C CAPACITOR" 2521.65,3594.49 r90 bottom
C37 "100pF 50V 0402 C0G" "0402 IPC CLASS C CAPACITOR" 2482.28,3885.83 r270 bottom
C38 "100nF 50V 0402 X7R" "0402 IPC CLASS C CAPACITOR" 2448.82,3885.83 r270 bottom
C39 "100nF 50V 0402 X7R" "0402 IPC CLASS C CAPACITOR" 2383.86,3885.83 r270 bottom
C40 "100pF 50V 0402 C0G" "0402 IPC CLASS C CAPACITOR" 2415.35,3885.83 r270 bottom
C41 "10uF 10V 0402 X5R" "0402 IPC CLASS C CAPACITOR" 2576.77,3889.76 r270 bottom
C42 "100nF 50V 0402 X7R" "0402 IPC CLASS C CAPACITOR" 2541.34,3889.76 r270 bottom
C43 "100nF 50V 0402 X7R" "0402 IPC CLASS C CAPACITOR" 2448.82,3694.88 r0 bottom
C44 "100nF 50V 0402 X7R" "0402 IPC CLASS C CAPACITOR" 2685.04,3625.98 r135 bottom
C45 "4.7uF 10V 0402 X5R" "0402 IPC CLASS C CAPACITOR" 2448.82,3627.95 r0 bottom
C46 "100nF 50V 0402 X7R" "0402 IPC CLASS C CAPACITOR" 2448.82,3661.42 r0 bottom
C47 "4.7uF 10V 0402 X5R" "0402 IPC CLASS C CAPACITOR" 2381.89,3740.16 r90 top
C48 "100nF 50V 0402 X7R" "0402 IPC CLASS C CAPACITOR" 2326.77,3625 r270 top
C49 "100nF 50V 0402 X7R" "0402 IPC CLASS C CAPACITOR" 2771.65,3760.83 r270 top
C50 "10uF 10V 0402 X5R" "0402 IPC CLASS C CAPACITOR" 2807.09,3760.83 r270 top
C51 "10uF 10V 0402 X5R" "0402 IPC CLASS C CAPACITOR" 2877.95,3760.83 r90 top
C52 "15pF 50V 0402 C0G" "0402 IPC CLASS C CAPACITOR" 2763.78,3598.43 r225 top
C53 "15pF 50V 0402 C0G" "0402 IPC CLASS C CAPACITOR" 2807.09,3641.73 r45 top
C54 "6pF 50V 0402 C0G" "0402 IPC CLASS C CAPACITOR" 2385.83,3901.57 r90 top
C55 "6pF 50V 0402 C0G" "0402 IPC CLASS C CAPACITOR" 2385.83,3838.58 r270 top
C56 "DNP 0402" "0402 IPC CLASS C CAPACITOR" 2362.2,3991.14 r270 top
C57 "DNP 0402" "0402 IPC CLASS C CAPACITOR" 2267.72,3991.14 r270 top
C58 "100nF 50V 0402 X7R" "0402 IPC CLASS C CAPACITOR" 3265.75,3590.55 r90 bottom
C59 "100pF 50V 0402 C0G" "0402 IPC CLASS C CAPACITOR" 3226.38,3889.76 r270 bottom
C60 "100nF 50V 0402 X7R" "0402 IPC CLASS C CAPACITOR" 3192.91,3889.76 r270 bottom
C61 "100nF 50V 0402 X7R" "0402 IPC CLASS C CAPACITOR" 3159.45,3889.76 r270 bottom
C62 "100pF 50V 0402 C0G" "0402 IPC CLASS C CAPACITOR" 3125.98,3889.76 r270 bottom
C63 "10uF 10V 0402 X5R" "0402 IPC CLASS C CAPACITOR" 3456.69,3590.55 r90 bottom
C64 "100nF 50V 0402 X7R" "0402 IPC CLASS C CAPACITOR" 3285.43,3889.76 r270 bottom
C65 "100nF 50V 0402 X7R" "0402 IPC CLASS C CAPACITOR" 3200.79,3629.92 r0 bottom
C66 "100nF 50V 0402 X7R" "0402 IPC CLASS C CAPACITOR" 3423.23,3590.55 r90 bottom
C67 "4.7uF 10V 0402 X5R" "0402 IPC CLASS C CAPACITOR" 3200.79,3696.85 r0 bottom
C68 "100nF 50V 0402 X7R" "0402 IPC CLASS C CAPACITOR" 3200.79,3663.39 r0 bottom
C69 "4.7uF 10V 0402 X5R" "0402 IPC CLASS C CAPACITOR" 3125.98,3740.16 r90 top
C70 "100nF 50V 0402 X7R" "0402 IPC CLASS C CAPACITOR" 3509.84,3752.95 r90 top
C71 "100nF 50V 0402 X7R" "0402 IPC CLASS C CAPACITOR" 3464.57,3769.68 r180 bottom
C72 "10uF 10V 0402 X5R" "0402 IPC CLASS C CAPACITOR" 3448.82,3803.15 r180 bottom
C73 "10uF 10V 0402 X5R" "0402 IPC CLASS C CAPACITOR" 3588.58,3769.68 r0 bottom
C74 "15pF 50V 0402 C0G" "0402 IPC CLASS C CAPACITOR" 3509.84,3625.98 r270 top
C75 "15pF 50V 0402 C0G" "0402 IPC CLASS C CAPACITOR" 3509.84,3688.98 r90 top
C76 "6pF 50V 0402 C0G" "0402 IPC CLASS C CAPACITOR" 3173.25,3937.03 r45 top
C77 "6pF 50V 0402 C0G" "0402 IPC CLASS C CAPACITOR" 3129.9,3893.68 r225 top
C78 "DNP 0402" "0402 IPC CLASS C CAPACITOR" 3385.83,3991.14 r270 top
C79 "DNP 0402" "0402 IPC CLASS C CAPACITOR" 3480.32,3991.14 r270 top
C80 "10uF 10V 0402 X5R" "0402 IPC CLASS C CAPACITOR" 2582.68,3102.36 r270 top
C81 "100nF 50V 0402 X7R" "0402 IPC CLASS C CAPACITOR" 2547.24,3102.36 r270 top
C82 "100nF 50V 0402 X7R" "0402 IPC CLASS C CAPACITOR" 2503.94,3086.61 r0 bottom
C83 "100nF 50V 0402 X7R" "0402 IPC CLASS C CAPACITOR" 2440.94,3173.23 r270 bottom
C84 "15pF 50V 0402 C0G" "0402 IPC CLASS C CAPACITOR" 2488.19,3027.56 r0 top
C85 "15pF 50V 0402 C0G" "0402 IPC CLASS C CAPACITOR" 2425.2,3027.56 r180 top
C86 "100nF 50V 0402 X7R" "0402 IPC CLASS C CAPACITOR" 2523.62,3342.52 r90 bottom
C87 "100nF 50V 0402 X7R" "0402 IPC CLASS C CAPACITOR" 2488.19,3342.52 r90 bottom
C88 "10uF 10V 0402 X5R" "0402 IPC CLASS C CAPACITOR" 2452.76,3342.52 r90 bottom
D1 "" "DRV0006A IPC-C" 2389.76,2484.25 r0 bottom
D2 "" "DRV0006A IPC-C" 3456.69,2811.02 r225 top
D3 "1N5819WS" "SOD-323 IPC-C" 3338.58,2799.21 r315 bottom
D4 "1N5819WS" "SOD-323 IPC-C" 2783.46,3409.45 r180 bottom
D5 "1N5819WS" "SOD-323 IPC-C" 2783.46,3346.46 r180 bottom
D6 "" "DRV0006A IPC-C" 2110.24,3476.38 r0 bottom
D7 "" FP-SOT23-IPC_C 2114.17,3366.14 r180 bottom
D8 "" "DRV0006A IPC-C" 2110.24,3098.43 r0 bottom
D9 "" FP-SOT23-IPC_C 2114.17,2988.19 r180 bottom
D10 "" "DRV0006A IPC-C" 2732.28,2586.61 r270 top
D11 "" FP-SOT23-IPC_C 3133.86,2539.37 r0 top
D12 "" "DRV0006A IPC-C" 3637.8,2901.57 r180 bottom
D13 "" FP-SOT23-IPC_C 3633.86,3011.81 r0 bottom
D14 "" "DRV0006A IPC-C" 3637.8,3279.53 r180 bottom
D15 "" FP-SOT23-IPC_C 3633.86,3389.76 r0 bottom
D16 "" "DRV0006A IPC-C" 2972.44,3948.82 r270 bottom
D17 "" FP-SOT23-IPC_C 2862.2,3944.88 r90 bottom
D18 "CDDFN10-3324P-ES" "DFN2510D-10 IPC-C" 2889.76,2996.06 r90 bottom
D19 "CDDFN10-3324P-ES" "DFN2510D-10 IPC-C" 3003.94,2996.06 r90 bottom
D20 "RGB LED" "NH-B1515RGBA-HF IPC-C" 2874.02,3413.39 r0 top
D21 "1N5819WS" "SOD-323 IPC-C" 2133.86,2385.83 r180 bottom
D22 "1N5819WS" "SOD-323 IPC-C" 2314.96,2622.05 r270 bottom
D23 "SP3031-01ETG" "SOD882 IPC-C" 3046.26,3127.95 r0 top
D24 "SP3031-01ETG" "SOD882 IPC-C" 3046.26,3246.06 r0 top
D25 "SP3031-01ETG" "SOD882 IPC-C" 2952.76,3188.98 r0 bottom
FB1 "BLM21SP111SN1D" "0603 IPC CLASS C FERRITE BEAD" 3131.89,2671.26 r90 top
FB2 "BLM21SP111SN1D" "0603 IPC CLASS C FERRITE BEAD" 3468.5,3389.76 r90 bottom
FB3 "BLM21SP111SN1D" "0603 IPC CLASS C FERRITE BEAD" 3468.5,3074.8 r90 bottom
FB4 "BLM15AX102SN1D" "0402 IPC CLASS C FERRITE BEAD" 2263.78,3280.51 r270 top
FB5 "BLM15AX102SN1D" "0402 IPC CLASS C FERRITE BEAD" 2913.39,3078.74 r0 bottom
FB6 "BLM15AX102SN1D" "0402 IPC CLASS C FERRITE BEAD" 2232.28,2397.64 r180 bottom
FB7 "BLM15AX102SN1D" "0402 IPC CLASS C FERRITE BEAD" 2314.96,2775.59 r0 bottom
FB8 "BLM15AX102SN1D" "0402 IPC CLASS C FERRITE BEAD" 2432.09,3933.07 r180 bottom
FB9 "BLM15AX102SN1D" "0402 IPC CLASS C FERRITE BEAD" 2842.52,3760.83 r270 top
FB10 "BLM15AX102SN1D" "0402 IPC CLASS C FERRITE BEAD" 2576.77,3952.76 r270 bottom
FB11 "BLM15AX102SN1D" "0402 IPC CLASS C FERRITE BEAD" 3176.18,3937.01 r180 bottom
FB12 "BLM15AX102SN1D" "0402 IPC CLASS C FERRITE BEAD" 3526.57,3769.68 r0 bottom
FB13 "BLM15AX102SN1D" "0402 IPC CLASS C FERRITE BEAD" 3439.96,3541.34 r0 bottom
FB14 "BLM15AX102SN1D" "0402 IPC CLASS C FERRITE BEAD" 2618.11,3102.36 r90 top
FB15 "BLM15AX102SN1D" "0402 IPC CLASS C FERRITE BEAD" 2452.76,3279.53 r270 bottom
J1 "TYPEC-304J-BCP16" VALCON_CSP-USC16-TR 3429.13,2633.86 r45 top locked
L1 "1uH 3.3A 1008" "1008 Inductor IPC-C" 2893.7,2606.3 r180 top
L2 "1uH 3.3A 1008" "1008 Inductor IPC-C" 3366.14,3271.65 r0 top
L3 "1uH 3.3A 1008" "1008 Inductor IPC-C" 3366.14,2956.69 r0 top
L4 "10nF 300mA 0402" "0402 IPC CLASS C FERRITE BEAD" 2381.89,3690.94 r0 top
L5 "10uH 400mA 0603" "0603 IPC CLASS C INDUCTOR" 2327.76,3718.5 r270 top
L6 "0R 0402" "0402 IPC CLASS C FERRITE BEAD" 2314.96,4007.87 r180 top
L7 "10nF 300mA 0402" "0402 IPC CLASS C FERRITE BEAD" 3125.98,3690.94 r0 top
L8 "10uH 400mA 0603" "0603 IPC CLASS C INDUCTOR" 3071.85,3718.5 r270 top
L9 "0R 0402" "0402 IPC CLASS C FERRITE BEAD" 3433.07,4007.87 r0 top
LS1 "SMD BUZZER" MLT-5020 2385.83,2677.17 r270 top
P2 "JST-GH-04P-RA" JST-GH-04P-RA 2157.48,3377.95 r270 top locked
P3 "JST-GH-04P-RA" JST-GH-04P-RA 2157.48,3000 r270 top locked
P4 "JST-GH-04P-RA" JST-GH-04P-RA 2874.02,2472.44 r0 top locked
P5 "JST-GH-04P-RA" JST-GH-04P-RA 3590.55,3000 r90 top locked
P6 "JST-GH-04P-RA" JST-GH-04P-RA 3590.55,3377.95 r90 top locked
P7 "JST-GH-04P-RA" JST-GH-04P-RA 2874.02,3901.57 r180 top locked
Q1 "AO3400A" "SOT-23 IPC-C" 2114.17,2488.19 r270 bottom
Q2 "AO3400A" "SOT-23 IPC-C" 2417.32,2625.98 r270 bottom
R1 "10k 0402" "0402 IPC CLASS C RESISTOR" 3000,2826.77 r0 top
R2 "137k 0402" "0402 IPC CLASS C RESISTOR" 2472.44,2472.44 r270 bottom
R3 "10k 0402" "0402 IPC CLASS C RESISTOR" 2937.01,2826.77 r0 top
R4 "137k 0402" "0402 IPC CLASS C RESISTOR" 2472.44,2535.43 r270 bottom
R5 "14k 0402" "0402 IPC CLASS C RESISTOR" 3068.9,2805.12 r180 top
R6 "10k 0402" "0402 IPC CLASS C RESISTOR" 2874.02,2826.77 r180 top
R7 "10k 0402" "0402 IPC CLASS C RESISTOR" 3068.9,2769.69 r0 top
R8 "768k 0402" "0402 IPC CLASS C RESISTOR" 3307.09,3389.76 r90 bottom
R9 "137k 0402" "0402 IPC CLASS C RESISTOR" 3323.82,3437.01 r180 bottom
R10 "30.9K 0402" "0402 IPC CLASS C RESISTOR" 3480.32,2429.13 r225 bottom
R11 "10k 0402" "0402 IPC CLASS C RESISTOR" 3523.62,2472.44 r225 bottom
R12 "180K 0402" "0402 IPC CLASS C RESISTOR" 3421.26,3453.74 r90 bottom
R13 "1.62M 0402" "0402 IPC CLASS C RESISTOR" 3307.09,3074.8 r270 bottom
R14 "180K 0402" "0402 IPC CLASS C RESISTOR" 3323.82,3122.05 r180 bottom
R15 "0R 0402" "0402 IPC CLASS B RESISTOR" 2759.84,3188.98 r180 bottom
R16 "DNP 0402" "0402 IPC CLASS B RESISTOR" 2759.84,3149.61 r0 bottom
R17 "10k 0402" "0402 IPC CLASS C RESISTOR" 2346.46,3468.5 r0 top
R18 "10k 0402" "0402 IPC CLASS C RESISTOR" 2346.46,3433.07 r0 top
R20 "2K 0402" "0402 IPC CLASS C RESISTOR" 2874.02,3267.72 r270 bottom
R21 "5.1K 0402" "0402 IPC CLASS C RESISTOR" 2704.72,3177.17 r90 bottom
R22 "22R 0402" "0402 IPC CLASS C RESISTOR" 2673.23,3952.76 r90 top
R23 "22R 0402" "0402 IPC CLASS C RESISTOR" 2482.28,3531.5 r270 top
R24 "10k 0402" "0402 IPC CLASS C RESISTOR" 2704.72,3114.17 r270 bottom
R25 "22R 0402" "0402 IPC CLASS C RESISTOR" 2637.8,3952.76 r90 top
R26 "22R 0402" "0402 IPC CLASS C RESISTOR" 3078.74,3059.06 r270 bottom
R27 "10k 0402" "0402 IPC CLASS C RESISTOR" 3043.31,3059.06 r270 bottom
R28 "1K 0402" "0402 IPC CLASS C RESISTOR" 2787.4,3437.01 r0 top
R29 "1K 0402" "0402 IPC CLASS C RESISTOR" 2787.4,3401.57 r180 top
R30 "5.1K 0402" "0402 IPC CLASS C RESISTOR" 2082.68,2582.68 r180 bottom
R31 "10k 0402" "0402 IPC CLASS C RESISTOR" 2145.67,2582.68 r180 bottom
R32 "1K 0402" "0402 IPC CLASS C RESISTOR" 2787.4,3366.14 r180 top
R33 "5.1K 0402" "0402 IPC CLASS C RESISTOR" 2385.83,2720.47 r180 bottom
R34 "10k 0402" "0402 IPC CLASS C RESISTOR" 2448.82,2720.47 r180 bottom
R35 "10k 0402" "0402 IPC CLASS C RESISTOR" 2291.34,3625 r270 top
R36 "DNP 0402" "0402 IPC CLASS C RESISTOR" 2781.5,3690.94 r0 top
R37 "10k 0402" "0402 IPC CLASS C RESISTOR" 2781.5,3690.94 r180 bottom
R38 "10k 0402" "0402 IPC CLASS C RESISTOR" 3543.31,3752.95 r90 top
R39 "DNP 0402" "0402 IPC CLASS C RESISTOR" 3464.57,3690.94 r180 bottom
R40 "10k 0402" "0402 IPC CLASS C RESISTOR" 3464.57,3657.48 r0 bottom
R41 "10k 0402" "0402 IPC CLASS C RESISTOR" 2562.99,3153.54 r180 top
R42 "DNP 0402" "0402 IPC CLASS C RESISTOR" 2562.99,3188.98 r180 top
R43 "10k 0402" "0402 IPC CLASS C RESISTOR" 2405.51,3173.23 r270 bottom
R44 "DNP 0402" "0402 IPC CLASS C RESISTOR" 2488.19,3192.91 r180 bottom
R45 "DNP 0402" "0402 IPC CLASS C RESISTOR" 2488.19,3157.48 r180 bottom
R46 "10k 0402" "0402 IPC CLASS C RESISTOR" 2346.46,3122.05 r0 bottom
R47 "10k 0402" "0402 IPC CLASS C RESISTOR" 2551.18,3192.91 r180 bottom
R48 "10k 0402" "0402 IPC CLASS C RESISTOR" 2551.18,3157.48 r180 bottom
R49 "DNP 0402" "0402 IPC CLASS C RESISTOR" 2346.46,3086.61 r180 bottom
R50 "2.43K 0402" "0402 IPC CLASS C RESISTOR" 2346.46,3192.91 r0 bottom
R52 "2.43K 0402" "0402 IPC CLASS C RESISTOR" 2346.46,3157.48 r0 bottom
R56 "2.43K 0402" "0402 IPC CLASS C RESISTOR" 2342.52,3027.56 r180 top
R57 "2.43K 0402" "0402 IPC CLASS C RESISTOR" 2342.52,2992.13 r180 top
R58 "DNP 0402" "0402 IPC CLASS C RESISTOR" 2559.06,3279.53 r270 bottom
R59 "10k 0402" "0402 IPC CLASS C RESISTOR" 2559.06,3342.52 r270 bottom
R60 "5.1K 0402" "0402 IPC CLASS C RESISTOR" 2523.62,3279.53 r270 bottom
R61 "5.1K 0402" "0402 IPC CLASS C RESISTOR" 2488.19,3279.53 r270 bottom
R66 "5.1K 0402" "0402 IPC CLASS C RESISTOR" 3358.27,2669.29 r225 top
R67 "5.1K 0402" "0402 IPC CLASS C RESISTOR" 3405.51,2716.54 r45 top
R69 "0R 0402" "0402 IPC CLASS B RESISTOR" 2244.09,3362.2 r270 top
R70 "120R 0402" "0402 IPC CLASS C RESISTOR" 2244.09,3429.13 r270 top
S1 "TS-1109S-C-D" TS-1127-C 2874.02,3188.98 r0 top
T1 "Test Point TH" "Test Point TH"#1 2429.13,2385.83 r0 top
T2 "Test Point TH" "Test Point TH"#1 2350.39,2385.83 r0 top
T3 "TP" Testpoint1 3129.92,3019.68 r180 bottom
T4 "TP" Testpoint1 3212.6,3393.7 r0 top
T5 "TP" Testpoint1 3282.71,2646.65 r0 top
T6 "TP" Testpoint1 3314.96,2692.91 r180 bottom
T7 "" "Test Point TH"#2 2244.09,2834.65 r0 top
T8 "" "Test Point TH"#2 2401.57,2877.95 r180 bottom
T9 "Test Point TH" "Test Point TH"#2 2165.35,3759.84 r180 top
T10 "Test Point TH" "Test Point TH"#2 2165.35,3681.1 r0 top
T11 "Test Point TH" "Test Point TH"#2 2228.35,3641.73 r270 top
T12 "Test Point TH" "Test Point TH"#2 2228.35,3720.47 r270 top
T13 "Test Point TH" "Test Point TH"#2 2165.35,3602.36 r270 top
T14 "Test Point TH" "Test Point TH"#2 3696.85,3598.43 r180 top
T15 "Test Point TH" "Test Point TH"#2 3696.85,3677.17 r180 top
T16 "Test Point TH" "Test Point TH"#2 3633.86,3716.54 r0 top
T17 "Test Point TH" "Test Point TH"#2 3633.86,3637.8 r0 top
T18 "Test Point TH" "Test Point TH"#2 3696.85,3755.91 r180 top
T19 "TP" Testpoint1 3213.58,3077.76 r90 top
T20 "TP" Testpoint1 3185.04,3279.53 r90 bottom
T21 "TP" Testpoint1 2385.83,3507.87 r90 top
T22 "TP" Testpoint1 2712.6,3559.06 r90 bottom
T23 "TP" Testpoint1 2748.03,3062.99 r90 bottom
T24 "TP" Testpoint1 2783.46,3059.06 r90 top
T25 "TP" Testpoint1 2814.96,3007.87 r90 top
T26 "TP" Testpoint1 2964.57,3031.5 r90 top
T27 "TP" Testpoint1 3078.74,3062.99 r90 top
T28 "TP" Testpoint1 3023.62,3593.88 r90 top
T29 "TP" Testpoint1 3098.43,3531.5 r90 top
T30 "TP" Testpoint1 2984.25,3511.81 r90 top
T31 "TP" Testpoint1 2255.91,3220.47 r90 bottom
T32 "TP" Testpoint1 2325.79,2948.82 r90 top
T33 "TP" Testpoint1 2460.63,3397.64 r90 top
T34 "TP" Testpoint1 2708.66,3692.91 r90 bottom
T35 "TP" Testpoint1 2874.02,3677.17 r90 top
T36 "TP" Testpoint1 2592.52,3360.24 r90 top
TP1 "Test Point TH" "Test Point TH"#3 2874.02,3188.98 r90 bottom
U1 "BQ25308RTER" "RTE0016C IPC-C" 2960.63,2732.28 r180 top
U2 "TPS63020DSJR" FP-DSJ0014A-MFG 3366.14,3417.32 r0 top
U3 "TPS2117DRLR" "DRL0008A IPC-C" 3452.76,2500 r225 bottom
U4 "TPS63020DSJR" FP-DSJ0014A-MFG 3366.14,3102.36 r0 top
U5 "THVD1426DRLR" "DRL0008A IPC-C" 2326.77,3366.14 r180 top
U6 "PT2041AD6" "DFN2X2-6L IPC-C" 2763.78,3259.84 r180 bottom
U7 "Micro SD card Slot" XKTF-015-G 2874.02,2681.1 r180 bottom locked
U8 "SMD ERM Motor" Z3OC1T8219731 2133.86,2503.94 r270 top
U9 "STM32WB55CGU6" "UFQFPN48 IPC-C" 2570.87,3740.16 r180 top locked
U10 "MLPF-WB55-01E3" MLPF-WB55-01E3 2491.21,3959.72 r45 top
U11 "STM32WB55CGU6" "UFQFPN48 IPC-C" 3314.96,3740.16 r180 top locked
U12 "MLPF-WB55-01E3" MLPF-WB55-01E3 3299.21,3968.5 r315 top
U13 "BNO085" "LGA-28 BNO055 IPC-C" 2417.32,3129.92 r180 top
U14 "ICM-45686" "LGA-14 ICM-45686 IPC-C" 2503.94,3303.15 r180 top
Y1 "32.768KHz XTAL" "SMD3215-2P IPC-C" 2826.77,3578.74 r45 top
Y2 "32MHz 2016-4P" "SMD2016-4P IPC-C" 2326.77,3885.83 r270 top
Y3 "32.768KHz XTAL" "SMD3215-2P IPC-C" 3564.96,3648.62 r90 top
Y4 "32MHz 2016-4P" "SMD2016-4P IPC-C" 3118.11,3968.5 r225 top
Y5 "32.768KHz XTAL" "SMD3215-2P IPC-C" 2456.69,2972.44 r180 top

## Footprints (in the part's own frame and the unit in brackets; to place one, negate y for a bottom-side part, rotate by r counter-clockwise, add the part's x,y. Pads: shape width x height; smd on the part's side, far side on the other; paste and mask are expansions set on the pad)
"0402 IPC CLASS B RESISTOR" [mm] "Chip Resistor, 2-Leads, Body 1.00x0.50mm, IPC Medium Density"
  rect 0.55x0.55 smd mask+0.051: 1(-0.475,0) 2(0.475,0)
  silkscreen extent -0.05,-0.28 0.05,0.28, body extent -0.55,-0.28 0.55,0.28, height 0.4
"0402 IPC CLASS C CAPACITOR" [mm] "MLCC, 2-Leads, Body 1.00x0.50mm, IPC High Density"
  rect 0.45x0.45 smd mask+0.051: 1(-0.425,0) 2(0.425,0)
  silkscreen extent -0.05,-0.28 0.05,0.28, body extent -0.5,-0.25 0.5,0.25, height 0.7
"0402 IPC Class C Capacitor" [mm] "MLCC, 2-Leads, Body 1.00x0.50mm, IPC High Density"
  rect 0.45x0.45 smd mask+0.051: 1(-0.425,0) 2(0.425,0)
  silkscreen extent -0.05,-0.28 0.05,0.28, body extent -0.5,-0.25 0.5,0.25, height 0.7
"0402 IPC CLASS C FERRITE BEAD" [mm]
  rect 0.45x0.45 smd mask+0.051: 1(-0.425,0) 2(0.425,0)
  silkscreen extent -0.05,-0.28 0.05,0.28, body extent -0.5,-0.25 0.5,0.25, height 0.5
"0402 IPC CLASS C RESISTOR" [mm]
  rect 0.45x0.45 smd mask+0.051: 1(-0.425,0) 2(0.425,0)
  silkscreen extent -0.05,-0.28 0.05,0.28, body extent -0.55,-0.28 0.55,0.28, height 0.4
"0603 IPC CLASS C CAPACITOR" [mm] "MLCC, 2-Leads, Body 1.60x0.80mm, IPC High Density"
  rect 0.75x0.8 smd mask+0.051: 1(-0.625,0) 2(0.625,0)
  silkscreen extent -0.1,-0.45 0.1,0.45, body extent -0.8,-0.4 0.8,0.4, height 0.9
"0603 IPC CLASS C FERRITE BEAD" [mm] "Ferrite Bead, 2-Leads, Body 1.60x0.80mm, IPC High Density"
  rect 0.75x0.8 smd mask+0.051: 1(-0.625,0) 2(0.625,0)
  silkscreen extent -0.1,-0.45 0.1,0.45, body extent -0.8,-0.4 0.8,0.4, height 0.5
"0603 IPC CLASS C INDUCTOR" [mm] "Inductor, 2-Leads, Body 1.60x0.80mm, IPC High Density"
  rect 0.75x0.8 smd mask+0.051: 1(-0.625,0) 2(0.625,0)
  silkscreen extent -0.1,-0.45 0.1,0.45, body extent -0.8,-0.4 0.8,0.4, height 0.5
"1008 Inductor IPC-C" [mm] "Chip Inductor, 2-Leads, Body 2.50x2.00mm, IPC High Density"
  rect 1.03x2.12 smd: 1(-0.985,0) 2(0.985,0)
  silkscreen extent -0.1,-0.96 0.1,0.96, body extent -1.35,-1.1 1.35,1.1, height 1.2
"2450AT18B100E IPC-C" [mm] "Chip Diode, 2-Leads, Body 3.20x1.60mm, IPC High Density"
  rect 1.15x1.7 smd: 1(-1.275,0) 2(1.275,0)
  silkscreen extent -2.11,-0.75 0.3,1.11, body extent -1.6,-0.8 1.6,0.8, height 1.4
"DFN2X2-6L IPC-C" [mm] "SON, 6-Leads, Body 2.00x2.00mm, Pitch 0.65mm, Thermal Pad 1.30x0.77mm, IPC High Density"
  rect 0.65x0.35 smd mask+0.051: 1(-0.91,0.65) 2(-0.91,0) 3(-0.91,-0.65) 4(0.91,-0.65) 5(0.91,0) 6(0.91,0.65)
  rect 0.77x1.3 smd mask+0.051: 7(0,0)
  silkscreen extent -1.48,-1.17 1.02,1.22, body extent -1.03,-1.02 1.03,1.02, height 0.8
"DFN2510D-10 IPC-C" [mm] "SOT1165D, 10-Leads, Body 2.50x1.00mm, Pitch 0.50mm, IPC High Density"
  rect 0.4x0.2 smd mask+0.051: 1(-0.33,1) 2(-0.33,0.5) 4(-0.33,-0.5) 5(-0.33,-1) 6(0.33,-1) 7(0.33,-0.5) 9(0.33,0.5) 10(0.33,1)
  rect 0.4x0.4 smd mask+0.051: 3(-0.33,0) 8(0.33,0)
  silkscreen extent -0.95,1.35 -0.85,1.45, body extent -0.53,-1.28 0.53,1.28, height 0.55
"DRL0008A IPC-C" [mm] "TSSOP, 8-Leads, Body 2.10x1.20mm, Pitch 0.50mm, IPC High Density"
  oval 0.5x0.25 smd mask+0.051: 1(-0.7,0.75) 2(-0.7,0.25) 3(-0.7,-0.25) 4(-0.7,-0.75) 5(0.7,-0.75) 6(0.7,-0.25) 7(0.7,0.25) 8(0.7,0.75)
  silkscreen extent -0.97,-1.1 0.25,1.55, body extent -0.8,-1.05 0.8,1.05, height 0.6
"DRV0006A IPC-C" [mm] "SON, 6-Leads, Body 2.00x2.00mm, Pitch 0.65mm, Thermal Pad 1.60x0.89mm, IPC High Density"
  rect 0.6x0.3 smd mask+0.051: 1(-0.945,0.65) 2(-0.945,0) 3(-0.945,-0.65) 4(0.945,-0.65) 5(0.945,0) 6(0.945,0.65)
  rect 0.89x1.6 smd mask+0.051: 7(0,0)
  silkscreen extent -1.5,-1.2 1.05,1.25, body extent -1.05,-1.05 1.05,1.05, height 0.8
FP-DSJ0014A-MFG [mm]
  rrect100% 0.6x0.24 smd paste+0 mask+0: 1(-1.4,1.5) 2(-1.4,1) 3(-1.4,0.5) 4(-1.4,0) 5(-1.4,-0.5) 6(-1.4,-1) 7(-1.4,-1.5) 8(1.4,-1.5) 9(1.4,-1) 10(1.4,-0.5) 11(1.4,0) 12(1.4,0.5) 13(1.4,1) 14(1.4,1.5)
  round 1.422 smd paste-1000 mask+0: 15(0,0)
  SIG/GND1 region: -0.79,2.2 -0.59,2.2 -0.59,1.425 -0.33,1.425 -0.33,2.2 -0.13,2.2 -0.13,1.425 0.13,1.425 0.13,2.2 0.33,2.2 0.33,1.425 0.59,1.425 0.59,2.2 0.79,2.2 0.79,-2.2 0.59,-2.2 0.59,-1.425 0.33,-1.425 0.33,-2.2 0.13,-2.2 0.13,-1.425 -0.13,-1.425 -0.13,-2.2 -0.33,-2.2 -0.33,-1.425 -0.59,-1.425 -0.59,-2.2 -0.79,-2.2 -0.79,2.2
  silkscreen extent -2.32,-2.07 1.58,2.32, body extent -1.5,-2 1.5,2, height 1
FP-SOT23-IPC_C [mm]
  rect 1.055x0.522 smd paste+0 mask+0.051: 1(-0.875,0.95)
  rrect100% 1.055x0.522 smd paste+0 mask+0.051: 2(-0.875,-0.95) 3(0.875,0)
  silkscreen extent 0,-1.45 0.65,1.45, body extent -1.15,-1.45 1.15,1.45, height 1.1
JST-GH-04P-RA [mm] "-25℃~+85℃ 1 1.25mm 1A 1x4P 4 4.25mm 4P 50V 8.25mm Auxiliary Solder Pin GH LCP Phosphor bronze Surface Mount, Right Angle Tin UL94V-0 SMD,P=1.25mm,Surface Mount，Right Angle Wire To Board Connector ROHS"
  rect 0.6x1.7 smd: 1(-1.875,0.2) 2(-0.625,0.2) 3(0.625,0.2) 4(1.875,0.2)
  rect 1x2.7 smd: 5(-3.725,-3) 6(3.725,-3)
  silkscreen extent -4.13,-4.25 4.13,0, body extent -4.12,-4.13 4.13,0.72, height 4.45
"LGA-14 ICM-45686 IPC-C" [mm] "PQFN, 14-Leads, Body 3.00x2.50mm, Pitch 0.50mm, IPC High Density"
  oval 0.5x0.25 smd mask+0.051: 1(-1.15,0.75) 2(-1.15,0.25) 3(-1.15,-0.25) 4(-1.15,-0.75) 8(1.15,-0.75) 9(1.15,-0.25) 10(1.15,0.25) 11(1.15,0.75)
  oval 0.25x0.5 smd mask+0.051: 5(-0.5,-0.9) 6(0,-0.9) 7(0.5,-0.9) 12(0.5,0.9) 13(0,0.9) 14(-0.5,0.9)
  silkscreen extent -1.63,1.58 -1.38,1.82, body extent -1.55,-1.3 1.55,1.3, height 0.86
"LGA-28 BNO055 IPC-C" [mm] "PQFN, 28-Leads, Body 5.20x3.80mm, Pitch 0.50mm, IPC High Density"
  oval 0.25x0.5 smd mask+0.051: 1(-2.25,1.55) 6(-2.25,-1.55) 7(-1.75,-1.55) 8(-1.25,-1.55) 9(-0.75,-1.55) 10(-0.25,-1.55) 11(0.25,-1.55) 12(0.75,-1.55) 13(1.25,-1.55) 14(1.75,-1.55) 15(2.25,-1.55) 20(2.25,1.55) 21(1.75,1.55) 22(1.25,1.55) 23(0.75,1.55) 24(0.25,1.55) 25(-0.25,1.55) 26(-0.75,1.55) 27(-1.25,1.55) 28(-1.75,1.55)
  oval 0.5x0.25 smd mask+0.051: 2(-2.25,0.75) 3(-2.25,0.25) 4(-2.25,-0.25) 5(-2.25,-0.75) 16(2.25,-0.75) 17(2.25,-0.25) 18(2.25,0.25) 19(2.25,0.75)
  silkscreen extent -3.43,1.68 -3.18,1.92, body extent -2.65,-1.95 2.65,1.95, height 1.18
MLPF-WB55-01E3 [mm] "Signal Conditioning 2.4 GHz Matched filter companion chip for STM32WB55Cx and STM32WB55Rx"
  rect 0.3x0.3 smd mask+0.051: A1(-0.25,0.587) A2(-0.25,0) A3(-0.25,-0.587) B1(0.25,0.587) B2(0.25,0) B3(0.25,-0.587)
  silkscreen extent -0.75,0.9 -0.65,1, body extent -0.5,-0.8 0.5,0.8, height 0.45
MLT-5020 [mm] "-20℃~+70℃ 100mA 2.5mm 2V~4V 3V 4kHz 5.2mm 5.2mm 75dB Electromagnetic Passive (Externally Driven) SMD,5x5mm Buzzers ROHS"
  rect 1.7x0.7 smd paste+0 mask+0.05: 1(-2.3,-1.75) 2(2.3,-1.75) 3(-2.3,1.75)
  silkscreen extent -2.6,-2.65 2.6,2.63, body extent -2.6,-2.64 2.6,2.63, height 2.01
"NH-B1515RGBA-HF IPC-C" [mm] "SON, 4-Leads, Body 1.50x1.60mm, Pitch 0.70mm, IPC High Density"
  rect 0.8x0.35 smd: 1(-0.645,0.35) 2(0.645,0.35) 3(0.645,-0.35) 4(-0.645,-0.35)
  silkscreen extent -1.45,-0.95 1,1, body extent -0.8,-0.75 0.8,0.75, height 1
"RTE0016C IPC-C" [mm] "QFN, 16-Leads, Body 3.00x3.00mm, Pitch 0.50mm, Thermal Pad 1.68x1.68mm, IPC High Density"
  oval 0.7x0.25 smd mask+0.051: 1(-1.4,0.75) 2(-1.4,0.25) 3(-1.4,-0.25) 4(-1.4,-0.75) 9(1.4,-0.75) 10(1.4,-0.25) 11(1.4,0.25) 12(1.4,0.75)
  oval 0.25x0.7 smd mask+0.051: 5(-0.75,-1.4) 6(-0.25,-1.4) 7(0.25,-1.4) 8(0.75,-1.4) 13(0.75,1.4) 14(0.25,1.4) 15(-0.25,1.4) 16(-0.75,1.4)
  rect 1.68x1.68 smd mask+0.051: 17(0,0)
  silkscreen extent -2.03,-1.7 1.7,2.22, body extent -1.55,-1.55 1.55,1.55, height 0.8
"SMD2016-4P IPC-C" [mm] "DFN, 4-Leads, Body 2.00x1.60mm, Pitch 1.30mm, IPC High Density"
  rect 0.7x0.6 smd: 1(-0.7,-0.55) 2(0.7,-0.55) 3(0.7,0.55) 4(-0.7,0.55)
  silkscreen extent -1.5,-0.9 -1.4,-0.8, body extent -1,-0.8 1,0.8, height 0.45
"SMD3215-2P IPC-C" [mm] "DFN, 2-Leads, Body 1.50x3.20mm, Pitch 2.45mm, IPC High Density"
  rect 0.8x1.55 smd: 1(-1.25,0) 2(1.25,0)
  silkscreen extent -1.7,1.15 -1.6,1.25, body extent -1.6,-0.75 1.6,0.75, height 0.8
"SOD882 IPC-C" [mm] "DFN, 2-Leads, Body 0.60x1.00mm, Pitch 0.65mm, IPC High Density"
  rect 0.3x0.5 smd mask+0.051: 1(-0.325,0) 2(0.325,0)
  silkscreen extent -0.6,0.7 -0.5,0.8, body extent -0.55,-0.35 0.55,0.35, height 0.6
"SOD-323 IPC-C" [mm]
  rect 0.686x0.436 smd paste+0 mask+0.051: 1(-1.16,0)
  rrect100% 0.686x0.436 smd paste+0 mask+0.051: 2(1.16,0)
  silkscreen extent -1.51,-0.62 0.85,0.94, body extent -1.25,-0.62 1.25,0.62, height 1.1
"SOT-23 IPC-C" [mm] "SOT23, 3-Leads, Body 2.90x2.60mm, Pitch 0.95mm, IPC High Density"
  rect 0.85x0.6 smd: D(1.25,0) G(-1.25,0.95) S(-1.25,-0.95)
  silkscreen extent -1.37,-1.55 0.82,1.92, body extent -1.5,-1.55 1.5,1.55, height 1.4
"Test Point TH"#1 [mm] "Through Hole Test Point"
  round 1.5 hole 0.85 mask+0: 0(0,0)
"Test Point TH"#2 [mm] "Through Hole Test Point"
  round 1.2 hole 0.85 mask+0: 0(0,0)
"Test Point TH"#3 [mm] "Through Hole Test Point"
  round 2 hole 1 mask+0: 0(0,0)
Testpoint1 [mm] "SMD test point"
  round 1 smd: 0(0,0)
TS-1127-C [mm] "None Without 50mA 4.5mm 100000 Times 260gf 12V 4.5mm 1.5mm Round Button Standing paste SPST SMD Tactile Switches ROHS"
  rect 1.3x1.3 smd: 1(-2.779,1.464) 2(2.721,1.464) 3(-2.779,-1.536) 4(2.721,-1.536)
  silkscreen extent -2.43,-2.14 2.37,2.06, body extent -3,-2.25 3,2.25, height 1.6
"UFQFPN48 IPC-C" [mm] "QFN, 48-Leads, Body 7.00x7.00mm, Pitch 0.50mm, Thermal Pad 5.60x5.60mm, IPC High Density"
  oval 0.75x0.25 smd mask+0.051: 1(-3.375,2.75) 2(-3.375,2.25) 3(-3.375,1.75) 4(-3.375,1.25) 5(-3.375,0.75) 6(-3.375,0.25) 7(-3.375,-0.25) 8(-3.375,-0.75) 9(-3.375,-1.25) 10(-3.375,-1.75) 11(-3.375,-2.25) 12(-3.375,-2.75) 25(3.375,-2.75) 26(3.375,-2.25) 27(3.375,-1.75) 28(3.375,-1.25) 29(3.375,-0.75) 30(3.375,-0.25) 31(3.375,0.25) 32(3.375,0.75) 33(3.375,1.25) 34(3.375,1.75) 35(3.375,2.25) 36(3.375,2.75)
  oval 0.25x0.75 smd mask+0.051: 13(-2.75,-3.375) 14(-2.25,-3.375) 15(-1.75,-3.375) 16(-1.25,-3.375) 17(-0.75,-3.375) 18(-0.25,-3.375) 19(0.25,-3.375) 20(0.75,-3.375) 21(1.25,-3.375) 22(1.75,-3.375) 23(2.25,-3.375) 24(2.75,-3.375) 37(2.75,3.375) 38(2.25,3.375) 39(1.75,3.375) 40(1.25,3.375) 41(0.75,3.375) 42(0.25,3.375) 43(-0.25,3.375) 44(-0.75,3.375) 45(-1.25,3.375) 46(-1.75,3.375) 47(-2.25,3.375) 48(-2.75,3.375)
  rect 5.6x5.6 smd mask+0.051: 49(0,0)
  silkscreen extent -4.03,-3.7 3.7,4.22, body extent -3.55,-3.55 3.55,3.55, height 0.6
VALCON_CSP-USC16-TR [mm]
  rect 0.3x1.14 smd: A1(-3.35,0) A4(-2.55,0) A5(-1.25,0) A6(-0.25,0) A7(0.25,0) A8(1.25,0) A9(2.55,0) A12(3.35,0) B1(3.05,0) B4(2.25,0) B5(1.75,0) B6(0.75,0) B7(-0.75,0) B8(-1.75,0) B9(-2.25,0) B12(-3.05,0)
  oval 1x2 hole 0.65 slot 1.72 at 90 deg: S1(-4.325,-0.59) S2(4.325,-0.59)
  oval 0.9x1.8 hole 0.65 slot 1.4 at 90 deg: S3(-4.325,-4.77) S4(4.325,-4.77)
  round 0.65 hole 0.65 unplated: ""(-2.89,-1.07) ""(2.89,-1.07)
  silkscreen extent -5.67,-6.41 4.47,0.1, body extent -4.47,-7.35 4.47,0.4, height 3.26
XKTF-015-G [mm] "Micro-SD card Slot"
  rect 0.7x1.6 smd paste+0 mask+0.051: 1(2.245,5.365) 2(1.145,5.365) 3(0.045,5.365) 4(-1.055,5.365) 5(-2.155,5.365) 6(-3.255,5.365) 7(-4.355,5.365) 8(-5.455,5.365) 9(-6.555,5.365)
  rect 1.2x1.5 smd paste+0 mask+0.051: 10(-7.755,4.365)
  rect 1.2x2.2 smd paste+0 mask+0.051: 11(-7.755,-5.235) 13(7.745,-5.235)
  rect 1.6x1.5 smd paste+0 mask+0.051: 12(6.845,4.365)
  round 1 hole 1 unplated mask+0.102: ""(-4.955,-5.635) ""(3.045,-5.635)
  silkscreen extent -7.62,-9.71 7.62,5.14, body extent -8.08,-9.68 8.08,5.52, height 2.05
Z3OC1T8219731 [mm] "ERM Motor"
  rect 1.3x1.1 smd paste+0 mask+0.05: 1(3.05,1.6) 2(3.05,-1.6)
  oval 3.96x2.04 smd: 3(0,0)
  SIG/GND1 region: -2.5,1.7 1.8,1.7 1.8,0.5 3.3,0.5 3.3,-0.5 1.8,-0.5 1.8,-1.7 -2.5,-1.7 -2.5,-1.3 -3.3,-1.3 -3.3,-0.3 -2.5,-0.3 -2.5,0.3 -3.3,0.3 -3.3,1.3 -2.5,1.3 -2.5,1.7
  silkscreen extent -6.7,-2.2 3.63,2.2, body extent -6.7,-2.21 3.8,2.21, height 3.45

## Part data
C29: library part "Capacitor 0402"
C56 C57 C78 C79: library part "100nF 50V 0402 X7R"
D1 D2 D6 D8 D10 D12 D14 D16: library part TVS0500DRVR
D7 D9 D11 D13 D15 D17: library part SM712
D20: library part NH-B1515RGBA-HF
J1: library part "USB Type C"
L1 L2 L3: library part DFE252012F-1R0M=P2
L4 L6 L7 L9: library part SDCL1005C10NJTDF
L5 L8: library part MGFL1608F100MT-LF
LS1: library part MLT-5020
R1 R2 R3 R4 R6 R7 R8 R9 R11 R17 R18 R24 R27 R31 R34 R35 R37 R38 R40 R41 R43 R46 R47 R48 R59: library part "10k 1% 0402"
R5: library part "14k 1% 0402"
R10: library part "30.9K 1%  0402"
R12 R14: library part "180K 1% 0402"
R13: library part "1.62M 1% 0402"
R15 R16 R36 R39 R42 R44 R45 R49 R58 R69: library part "0R 1% 0402"
R20: library part "2K 1% 0402"
R21 R30 R33 R60 R61 R66 R67: library part "5.1K 1% 0402"
R22 R23 R25 R26: library part "22R 1% 0402"
R28 R29 R32: library part "1K 1% 0402"
R50 R52 R56 R57: library part "2.43K 1% 0402"
R70: library part "120R 1% 0402"
S1: library part TS-1127-C
T3 T4 T5 T6 T19 T20 T21 T22 T23 T24 T25 T26 T27 T28 T29 T30 T31 T32 T33 T34 T35 T36: library part Testpoint1
T7 T8: library part "Test Point TH"
U2 U4: library part CMP-2000-07282-2
U7: library part XKTF-015-G
U8: library part Z3OC1T8219731
Y1 Y3 Y5: library part H31003271C2070CY

## Free pads (board coordinates)
  round 78.74 hole 78.74 unplated mask+4: ""(2070.87,3744.09) ""(3665.35,2759.84)

## Via types
v1: diameter 20, hole 12, SIG/GND1 to SIG/GND3, tented both sides, 861 vias
v2: diameter 19.68, hole 11.81, SIG/GND1 to SIG/GND3, tented both sides, 67 vias

## Nets (pads, with @x,y where several pads share a name; then routed paths per layer and width w, separated by ;. In a path a pad name is that pad's centre, name@x,y a point inside that pad or via, vN(x,y) a via of type N, cw(c..) or ccw(c..) an arc to the next point about the centre after c; other vN are vias at no path point)
3V3_BNO: C80.1 C81.1 C82.1 FB14.2 R41.1 R43.2 R44.2 R45.2 R46.2 R50.2 R52.2 R56.1 R57.1 U13.3 U13.28 | length 765.8
  SIG/GND1 w10: U13.3@2505.91,3120.08 2505.98,3120 2546.34,3120 C81.1@2547.24,3119.09
  SIG/GND1 w12: v1(2481.81,3091.09) 2486.22,3086.68 U13.28@2486.22,3068.9
  SIG/GND1 w20: R57.1@2359.25,2992.13 v1(2359.25,3009.84) R56.1@2359.25,3027.56 ; C81.1@2547.24,3119.09 v1(2582.68,3119.09) ; R41.1@2579.72,3153.54 2579.72,3122.05 v1(2582.68,3119.09) ; v1(2618.11,3119.09) v1(2582.68,3119.09)
  SIG/GND3 w20: v1(2359.25,3009.84) 2359.25,3032.48 2421.26,3094.49 2421.26,3118.11 ; R46.2@2363.19,3122.05 R52.2@2363.19,3157.48 ; R50.2@2363.19,3192.91 R52.2@2363.19,3157.48 ; R44.2@2471.46,3192.91 R45.2@2471.46,3157.48 2471.46,3134.84 ; C82.1@2487.2,3086.61 2487.2,3119.09 ; v1(2582.68,3119.09) 2487.2,3119.09 ; R52.2@2363.19,3157.48 ccw(c2364.17,3157.48) 2364.17,3156.5 R43.2@2405.51,3156.5 2405.51,3133.86 2421.26,3118.11 ; 2421.26,3118.11 2454.72,3118.11 2471.46,3134.84 ; 2471.46,3134.84 2487.2,3119.09